# EAGLE board MicroView-GiantPanel-v10 (EAGLE 6.5.0), part 1 of 13
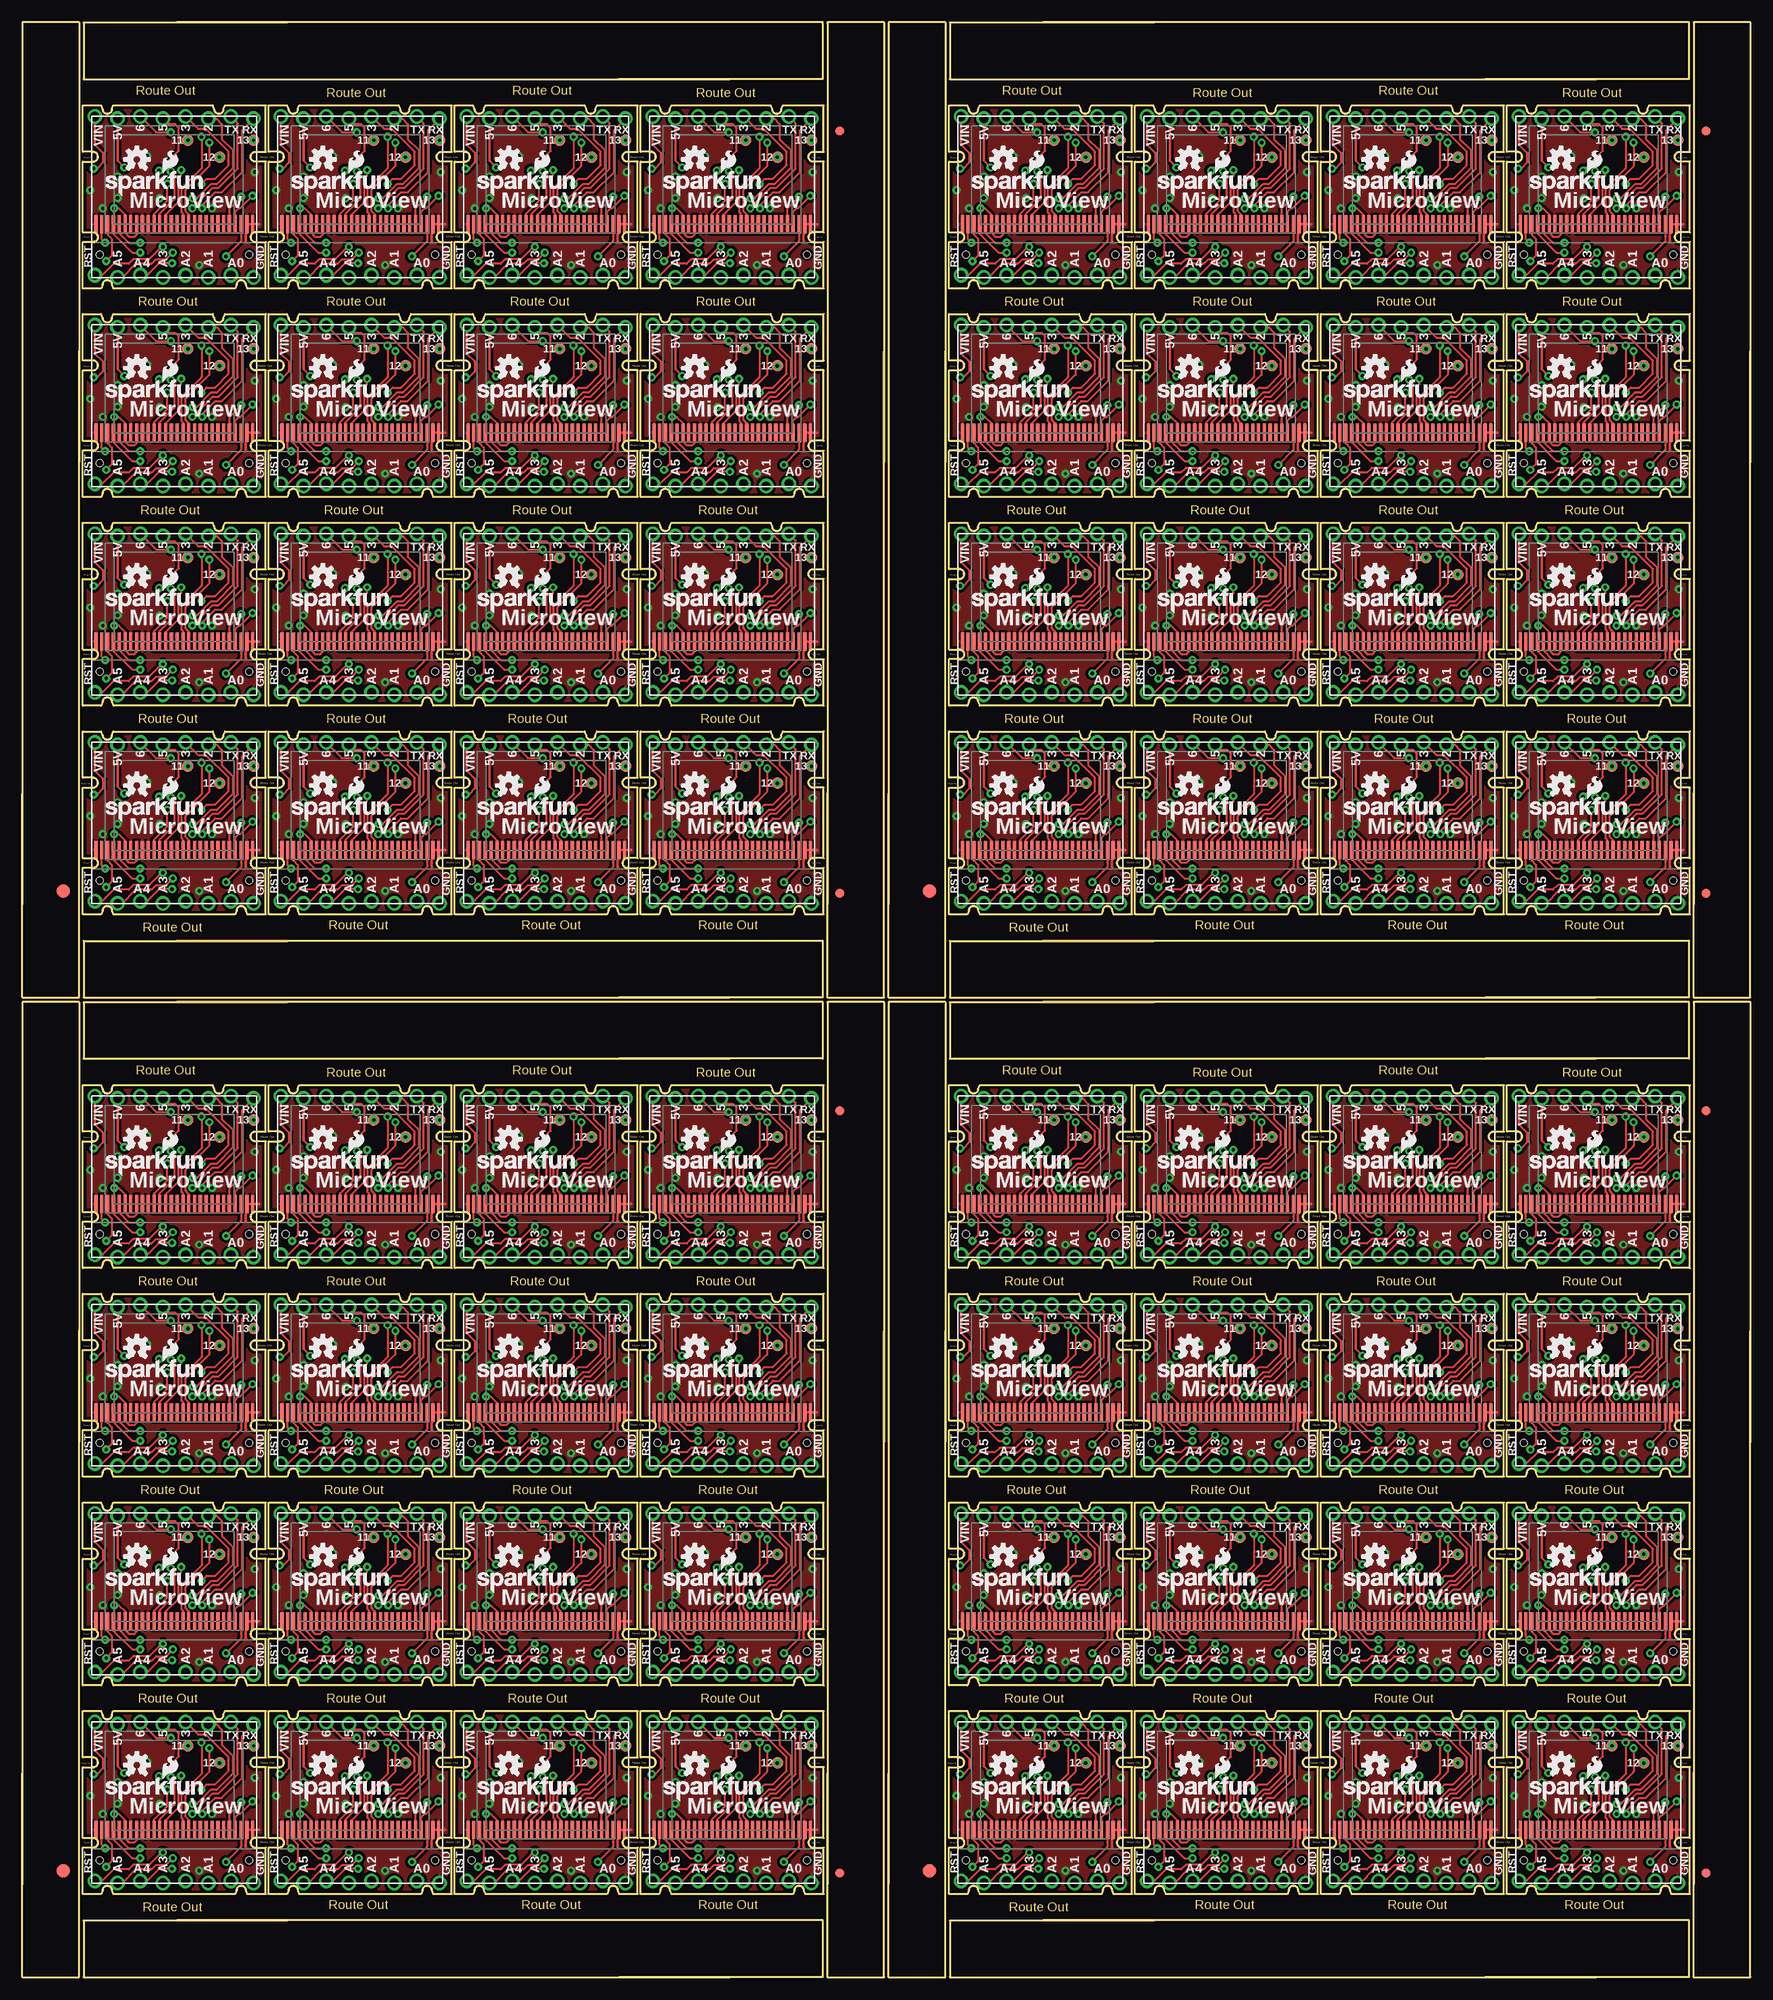
[diagram p0: board, top side]
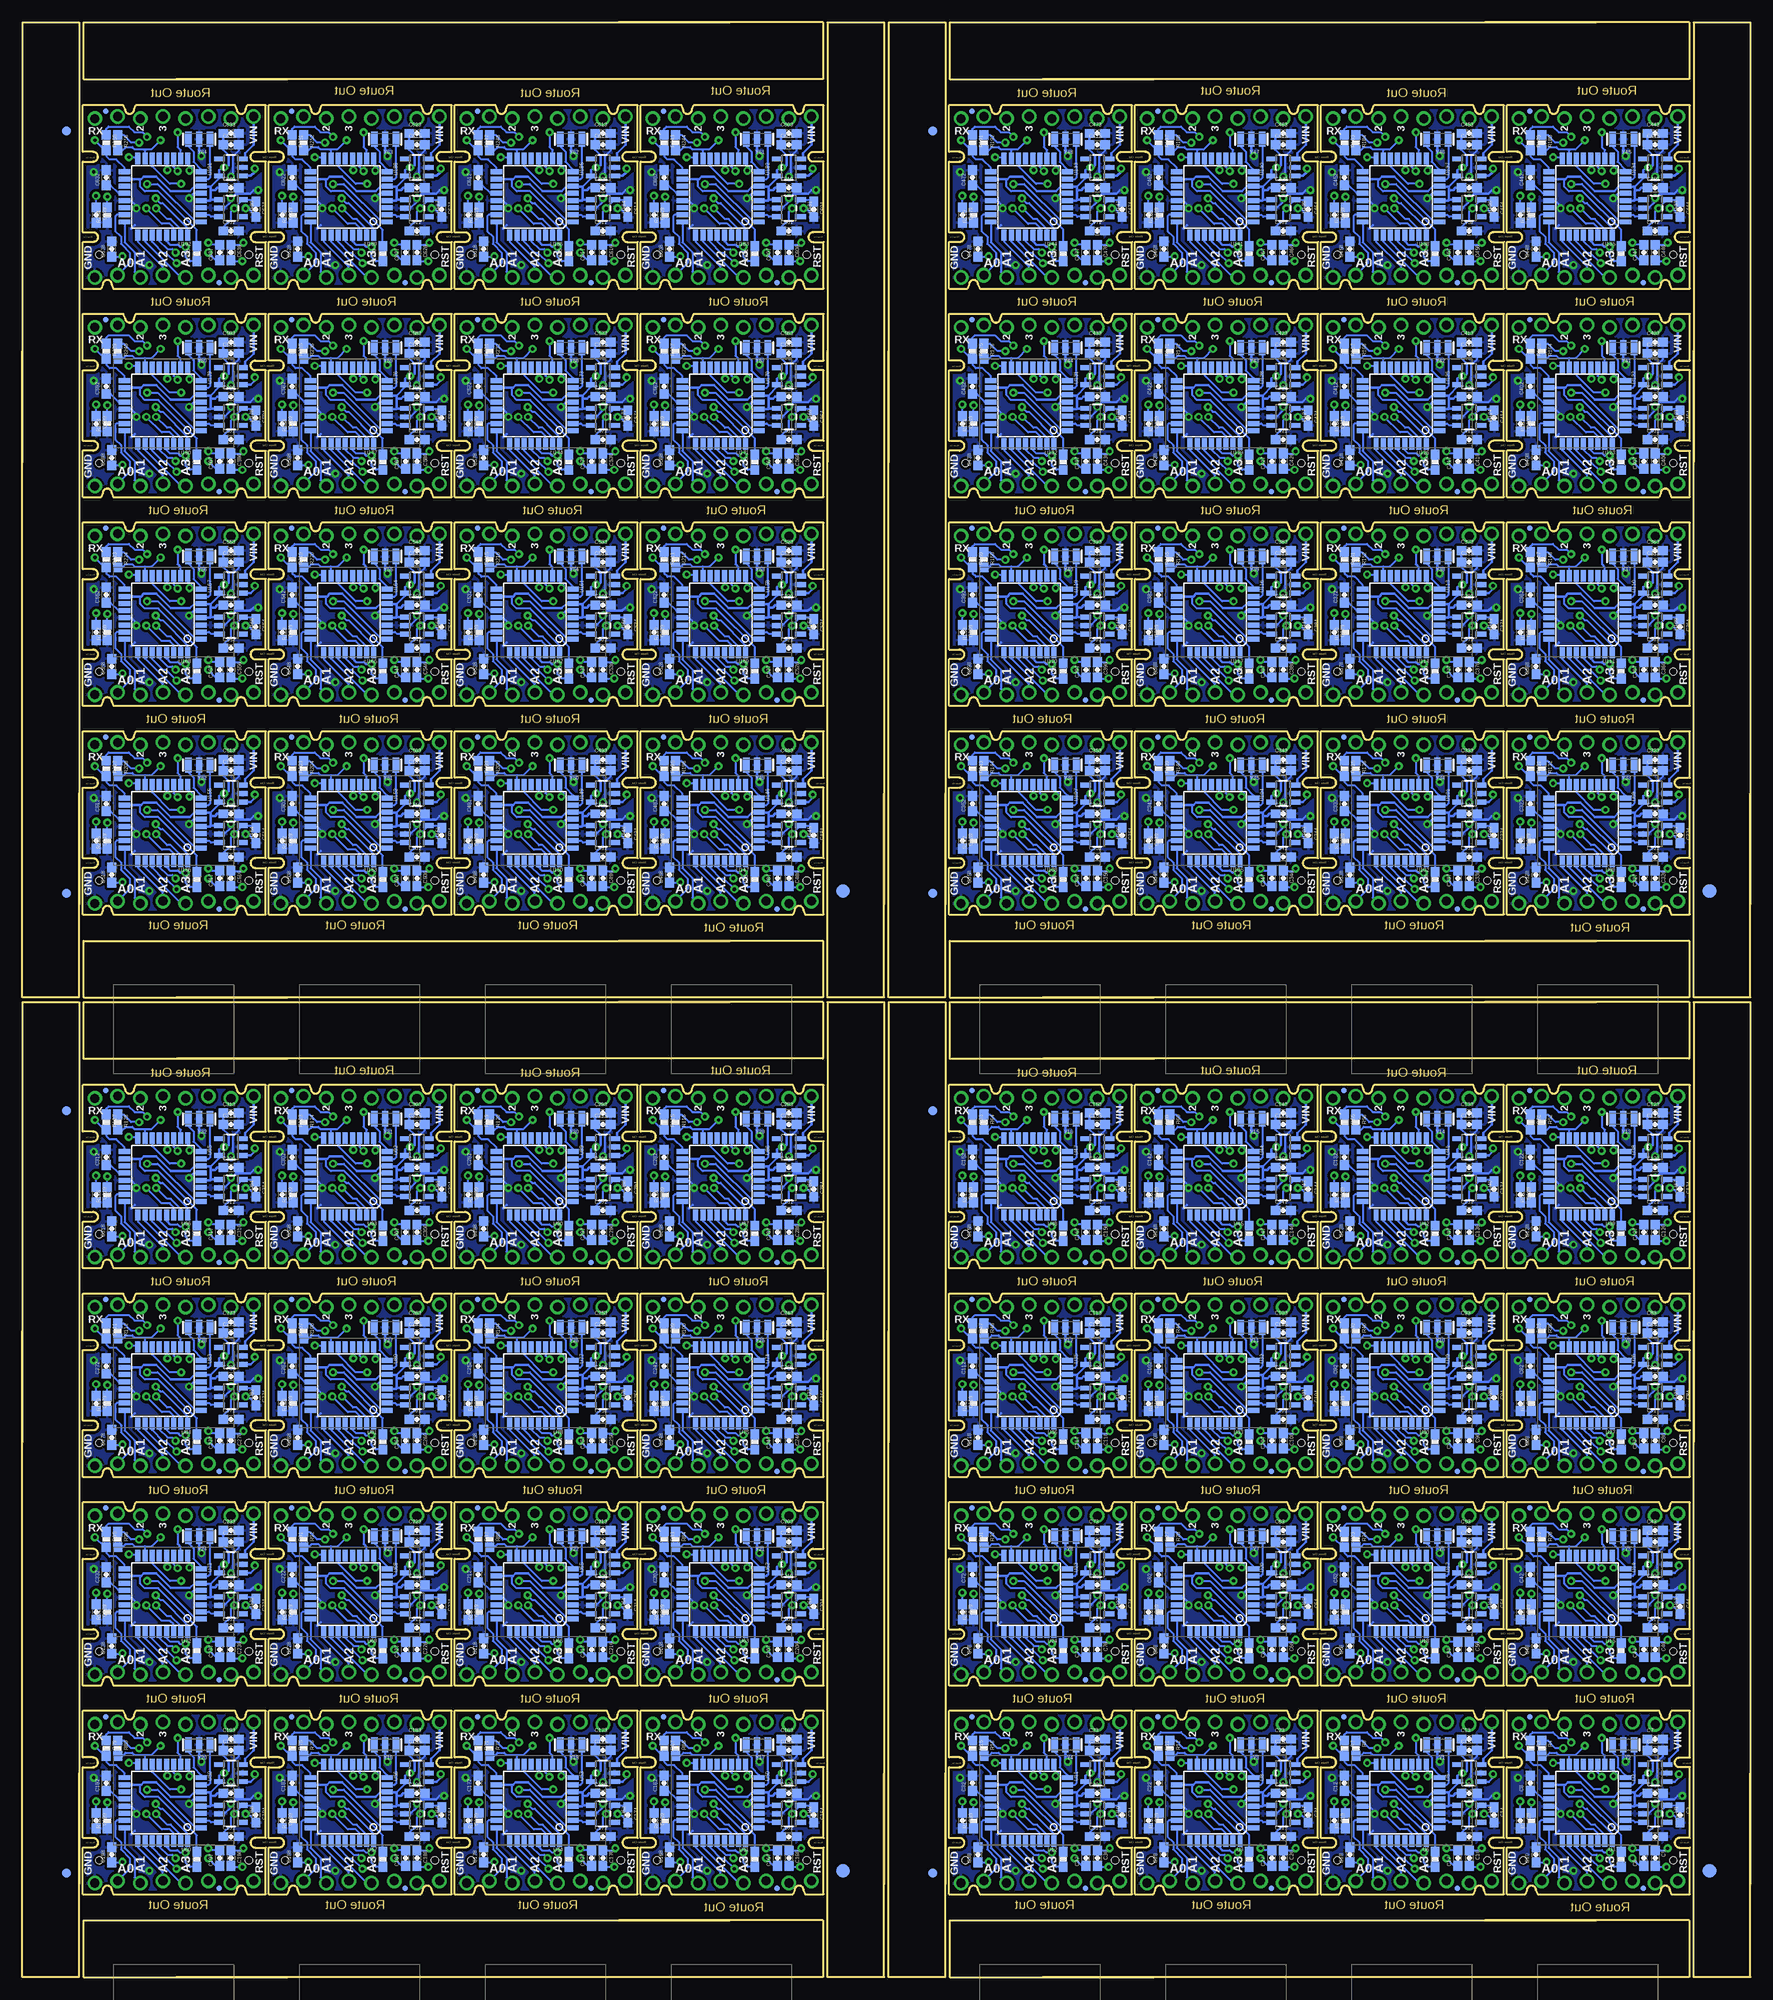
[diagram p1: board, bottom side, seen from below]

Size 193.55 x 218.95 mm. Coordinates in mm from the lower left corner, seen from the top.
Outline: 2400 segments
Copper layers (1*16): Top 0.035mm / dielectric 1.5mm / Bottom 0.035mm
Design rules "SparkFun-2-layer *": minimum track width 7mil, minimum drill 15mil, track to track 8mil, track to pad 8mil, pad to pad 8mil, via to via 8mil, smd to smd 8mil, copper to edge 8mil, drill to drill 8mil, minimum pad ring 12mil, minimum via ring 10mil, stop-mask expansion 4mil, vias tented up to drill 20mil, thermal gap 10mil

## Footprints (pad centres in the part's own frame; a part is rotated, then mirrored left to right if it is on the bottom)
0603-CAP = smd 1.1 x 1: 1 -0.85,0; 2 0.85,0
FIDUCIAL-1.5X3 = smd 1.5 x 1.5: 1 0,0
FIDUCIAL-1X2 = smd 1 x 1: 1 0,0
MICRO-FIDUCIAL = smd 0.635 x 0.635: 1 0,0
MV-DIP16 = drill 1.016: 1 -8.89,-8.763; 2 -6.35,-9.017; 3 -3.81,-8.763; 4 -1.27,-9.017; 5 1.27,-8.763; 6 3.81,-9.017; 7 6.35,-8.763; 8 8.89,-9.017; 9 8.89,8.763; 10 6.35,9.017; 11 3.81,8.763; 12 1.27,9.017; 13 -1.27,8.763; 14 -3.81,9.017; 15 -6.35,8.763; 16 -8.89,9.017
OLED-0.66-64X48 = smd 0.35 x 2: 1 0,0; 2 0.65,0; 3 1.3,0; 4 1.95,0; 5 2.6,0; 6 3.25,0; 7 3.9,0; 8 4.55,0; 9 5.2,0; 10 5.85,0; 11 6.5,0; 12 7.15,0; 13 7.8,0; 14 8.45,0; 15 9.1,0; 16 9.75,0; 17 10.4,0; 18 11.05,0; 19 11.7,0; 20 12.35,0; 21 13,0; 22 13.65,0; 23 14.3,0; 24 14.95,0; 25 15.6,0; 26 16.25,0; 27 16.9,0; 28 17.55,0 | hole 0.8: 17.15,-3.4; 0.4,-3.4
0603-RES = smd 1.1 x 1: 1 -0.85,0; 2 0.85,0
PAD.03X.05 = smd 1.27 x 1.27: P$1 0,0
SOT23-5 = smd 0.55 x 1.2: 1 -0.95,-1.3; 2 0,-1.3; 3 0.95,-1.3; 4 0.95,1.3; 5 -0.95,1.3
TQFP32-08 = smd 1.27 x 0.559: 1 -4.293,2.8; 2 -4.293,2; 3 -4.293,1.2; 4 -4.293,0.4; 5 -4.293,-0.4; 6 -4.293,-1.2; 7 -4.293,-2; 8 -4.293,-2.8; 17 4.293,-2.8; 18 4.293,-2; 19 4.293,-1.2; 20 4.293,-0.4; 21 4.293,0.4; 22 4.293,1.2; 23 4.293,2; 24 4.293,2.8 | smd 0.559 x 1.27: 9 -2.8,-4.293; 10 -2,-4.293; 11 -1.2,-4.293; 12 -0.4,-4.293; 13 0.4,-4.293; 14 1.2,-4.293; 15 2,-4.293; 16 2.8,-4.293; 25 2.8,4.293; 26 2,4.293; 27 1.2,4.293; 28 0.4,4.293; 29 -0.4,4.293; 30 -1.2,4.293; 31 -2,4.293; 32 -2.8,4.293
RESONATOR-SMD = smd 0.7 x 1.7: 1 -1.2,0; 2 0,0; 3 1.2,0

## Placement (x,y rotation side)
C1  1.0uF  [0603-CAP]  10.67,20.57 0 bottom
C2  1.0uF  [0603-CAP]  7.87,18.16 270 bottom
C3  0.1uF  [0603-CAP]  10.67,15.75 0 bottom
C4  1.0uF  [0603-CAP]  10.67,25.4 0 bottom
C5  1.0uF  [0603-CAP]  10.67,13.34 270 bottom
C6  1.0uF  [0603-CAP]  11.94,13.34 90 bottom
C7  0.1uF  [0603-CAP]  10.67,26.67 0 bottom
C8  0.1uF  [0603-CAP]  24.64,21.72 90 bottom
C9  2.2uF  [0603-CAP]  25.78,17.53 270 bottom
C10  2.2uF  [0603-CAP]  24,13.72 90 bottom
C11  0.1uF  [0603-CAP]  31.5,15.75 0 bottom
C12  0.1uF  [0603-CAP]  45.47,21.72 90 bottom
C13  0.1uF  [0603-CAP]  31.5,26.67 0 bottom
C14  1.0uF  [0603-CAP]  28.7,18.16 270 bottom
C15  1.0uF  [0603-CAP]  31.5,25.4 0 bottom
C16  1.0uF  [0603-CAP]  31.5,13.34 270 bottom
C17  1.0uF  [0603-CAP]  32.77,13.34 90 bottom
C18  2.2uF  [0603-CAP]  44.83,13.72 90 bottom
C19  2.2uF  [0603-CAP]  46.61,17.53 270 bottom
C20  1.0uF  [0603-CAP]  31.5,20.57 0 bottom
C21  0.1uF  [0603-CAP]  52.32,15.75 0 bottom
C22  0.1uF  [0603-CAP]  66.29,21.72 90 bottom
C23  0.1uF  [0603-CAP]  52.32,26.67 0 bottom
C24  1.0uF  [0603-CAP]  49.53,18.16 270 bottom
C25  1.0uF  [0603-CAP]  52.32,25.4 0 bottom
C26  1.0uF  [0603-CAP]  52.32,13.34 270 bottom
C27  1.0uF  [0603-CAP]  53.59,13.34 90 bottom
C28  2.2uF  [0603-CAP]  65.66,13.72 90 bottom
C29  2.2uF  [0603-CAP]  67.44,17.53 270 bottom
C30  1.0uF  [0603-CAP]  52.32,20.57 0 bottom
C31  0.1uF  [0603-CAP]  73.15,15.75 0 bottom
C32  0.1uF  [0603-CAP]  87.12,21.72 90 bottom
C33  0.1uF  [0603-CAP]  73.15,26.67 0 bottom
C34  1.0uF  [0603-CAP]  70.36,18.16 270 bottom
C35  1.0uF  [0603-CAP]  73.15,25.4 0 bottom
C36  1.0uF  [0603-CAP]  73.15,13.34 270 bottom
C37  1.0uF  [0603-CAP]  74.42,13.34 90 bottom
C38  2.2uF  [0603-CAP]  86.49,13.72 90 bottom
C39  2.2uF  [0603-CAP]  88.27,17.53 270 bottom
C40  1.0uF  [0603-CAP]  73.15,20.57 0 bottom
C41  0.1uF  [0603-CAP]  10.67,39.12 0 bottom
C42  0.1uF  [0603-CAP]  24.64,45.09 90 bottom
C43  0.1uF  [0603-CAP]  10.67,50.04 0 bottom
C44  1.0uF  [0603-CAP]  7.87,41.53 270 bottom
C45  1.0uF  [0603-CAP]  10.67,48.77 0 bottom
C46  1.0uF  [0603-CAP]  10.67,36.7 270 bottom
C47  1.0uF  [0603-CAP]  11.94,36.7 90 bottom
C48  2.2uF  [0603-CAP]  24,37.08 90 bottom
C49  2.2uF  [0603-CAP]  25.78,40.89 270 bottom
C50  1.0uF  [0603-CAP]  10.67,43.94 0 bottom
C51  0.1uF  [0603-CAP]  31.5,39.12 0 bottom
C52  0.1uF  [0603-CAP]  45.47,45.09 90 bottom
C53  0.1uF  [0603-CAP]  31.5,50.04 0 bottom
C54  1.0uF  [0603-CAP]  28.7,41.53 270 bottom
C55  1.0uF  [0603-CAP]  31.5,48.77 0 bottom
C56  1.0uF  [0603-CAP]  31.5,36.7 270 bottom
C57  1.0uF  [0603-CAP]  32.77,36.7 90 bottom
C58  2.2uF  [0603-CAP]  44.83,37.08 90 bottom
C59  2.2uF  [0603-CAP]  46.61,40.89 270 bottom
C60  1.0uF  [0603-CAP]  31.5,43.94 0 bottom
C61  0.1uF  [0603-CAP]  52.32,39.12 0 bottom
C62  0.1uF  [0603-CAP]  66.29,45.09 90 bottom
C63  0.1uF  [0603-CAP]  52.32,50.04 0 bottom
C64  1.0uF  [0603-CAP]  49.53,41.53 270 bottom
C65  1.0uF  [0603-CAP]  52.32,48.77 0 bottom
C66  1.0uF  [0603-CAP]  52.32,36.7 270 bottom
C67  1.0uF  [0603-CAP]  53.59,36.7 90 bottom
C68  2.2uF  [0603-CAP]  65.66,37.08 90 bottom
C69  2.2uF  [0603-CAP]  67.44,40.89 270 bottom
C70  1.0uF  [0603-CAP]  52.32,43.94 0 bottom
C71  0.1uF  [0603-CAP]  73.15,39.12 0 bottom
C72  0.1uF  [0603-CAP]  87.12,45.09 90 bottom
C73  0.1uF  [0603-CAP]  73.15,50.04 0 bottom
C74  1.0uF  [0603-CAP]  70.36,41.53 270 bottom
C75  1.0uF  [0603-CAP]  73.15,48.77 0 bottom
C76  1.0uF  [0603-CAP]  73.15,36.7 270 bottom
C77  1.0uF  [0603-CAP]  74.42,36.7 90 bottom
C78  2.2uF  [0603-CAP]  86.49,37.08 90 bottom
C79  2.2uF  [0603-CAP]  88.27,40.89 270 bottom
C80  1.0uF  [0603-CAP]  73.15,43.94 0 bottom
C81  0.1uF  [0603-CAP]  10.67,62.48 0 bottom
C82  0.1uF  [0603-CAP]  24.64,68.45 90 bottom
C83  0.1uF  [0603-CAP]  10.67,73.41 0 bottom
C84  1.0uF  [0603-CAP]  7.87,64.9 270 bottom
C85  1.0uF  [0603-CAP]  10.67,72.14 0 bottom
C86  1.0uF  [0603-CAP]  10.67,60.07 270 bottom
C87  1.0uF  [0603-CAP]  11.94,60.07 90 bottom
C88  2.2uF  [0603-CAP]  24,60.45 90 bottom
C89  2.2uF  [0603-CAP]  25.78,64.26 270 bottom
C90  1.0uF  [0603-CAP]  10.67,67.31 0 bottom
C91  0.1uF  [0603-CAP]  31.5,62.48 0 bottom
C92  0.1uF  [0603-CAP]  45.47,68.45 90 bottom
C93  0.1uF  [0603-CAP]  31.5,73.41 0 bottom
C94  1.0uF  [0603-CAP]  28.7,64.9 270 bottom
C95  1.0uF  [0603-CAP]  31.5,72.14 0 bottom
C96  1.0uF  [0603-CAP]  31.5,60.07 270 bottom
C97  1.0uF  [0603-CAP]  32.77,60.07 90 bottom
C98  2.2uF  [0603-CAP]  44.83,60.45 90 bottom
C99  2.2uF  [0603-CAP]  46.61,64.26 270 bottom
C100  1.0uF  [0603-CAP]  31.5,67.31 0 bottom
C101  0.1uF  [0603-CAP]  52.32,62.48 0 bottom
C102  0.1uF  [0603-CAP]  66.29,68.45 90 bottom
C103  0.1uF  [0603-CAP]  52.32,73.41 0 bottom
C104  1.0uF  [0603-CAP]  49.53,64.9 270 bottom
C105  1.0uF  [0603-CAP]  52.32,72.14 0 bottom
C106  1.0uF  [0603-CAP]  52.32,60.07 270 bottom
C107  1.0uF  [0603-CAP]  53.59,60.07 90 bottom
C108  2.2uF  [0603-CAP]  65.66,60.45 90 bottom
C109  2.2uF  [0603-CAP]  67.44,64.26 270 bottom
C110  1.0uF  [0603-CAP]  52.32,67.31 0 bottom
C111  0.1uF  [0603-CAP]  73.15,62.48 0 bottom
C112  0.1uF  [0603-CAP]  87.12,68.45 90 bottom
C113  0.1uF  [0603-CAP]  73.15,73.41 0 bottom
C114  1.0uF  [0603-CAP]  70.36,64.9 270 bottom
C115  1.0uF  [0603-CAP]  73.15,72.14 0 bottom
C116  1.0uF  [0603-CAP]  73.15,60.07 270 bottom
C117  1.0uF  [0603-CAP]  74.42,60.07 90 bottom
C118  2.2uF  [0603-CAP]  86.49,60.45 90 bottom
C119  2.2uF  [0603-CAP]  88.27,64.26 270 bottom
C120  1.0uF  [0603-CAP]  73.15,67.31 0 bottom
C121  0.1uF  [0603-CAP]  10.67,85.85 0 bottom
C122  0.1uF  [0603-CAP]  24.64,91.82 90 bottom
C123  0.1uF  [0603-CAP]  10.67,96.77 0 bottom
C124  1.0uF  [0603-CAP]  7.87,88.27 270 bottom
C125  1.0uF  [0603-CAP]  10.67,95.5 0 bottom
C126  1.0uF  [0603-CAP]  10.67,83.44 270 bottom
C127  1.0uF  [0603-CAP]  11.94,83.44 90 bottom
C128  2.2uF  [0603-CAP]  24,83.82 90 bottom
C129  2.2uF  [0603-CAP]  25.78,87.63 270 bottom
C130  1.0uF  [0603-CAP]  10.67,90.68 0 bottom
C131  0.1uF  [0603-CAP]  31.5,85.85 0 bottom
C132  0.1uF  [0603-CAP]  45.47,91.82 90 bottom
C133  0.1uF  [0603-CAP]  31.5,96.77 0 bottom
C134  1.0uF  [0603-CAP]  28.7,88.27 270 bottom
C135  1.0uF  [0603-CAP]  31.5,95.5 0 bottom
C136  1.0uF  [0603-CAP]  31.5,83.44 270 bottom
C137  1.0uF  [0603-CAP]  32.77,83.44 90 bottom
C138  2.2uF  [0603-CAP]  44.83,83.82 90 bottom
C139  2.2uF  [0603-CAP]  46.61,87.63 270 bottom
C140  1.0uF  [0603-CAP]  31.5,90.68 0 bottom
C141  0.1uF  [0603-CAP]  52.32,85.85 0 bottom
C142  0.1uF  [0603-CAP]  66.29,91.82 90 bottom
C143  0.1uF  [0603-CAP]  52.32,96.77 0 bottom
C144  1.0uF  [0603-CAP]  49.53,88.27 270 bottom
C145  1.0uF  [0603-CAP]  52.32,95.5 0 bottom
C146  1.0uF  [0603-CAP]  52.32,83.44 270 bottom
C147  1.0uF  [0603-CAP]  53.59,83.44 90 bottom
C148  2.2uF  [0603-CAP]  65.66,83.82 90 bottom
C149  2.2uF  [0603-CAP]  67.44,87.63 270 bottom
C150  1.0uF  [0603-CAP]  52.32,90.68 0 bottom
C151  0.1uF  [0603-CAP]  73.15,85.85 0 bottom
C152  0.1uF  [0603-CAP]  87.12,91.82 90 bottom
C153  0.1uF  [0603-CAP]  73.15,96.77 0 bottom
C154  1.0uF  [0603-CAP]  70.36,88.27 270 bottom
C155  1.0uF  [0603-CAP]  73.15,95.5 0 bottom
C156  1.0uF  [0603-CAP]  73.15,83.44 270 bottom
C157  1.0uF  [0603-CAP]  74.42,83.44 90 bottom
C158  2.2uF  [0603-CAP]  86.49,83.82 90 bottom
C159  2.2uF  [0603-CAP]  88.27,87.63 270 bottom
C160  1.0uF  [0603-CAP]  73.15,90.68 0 bottom
C161  0.1uF  [0603-CAP]  107.7,15.75 0 bottom
C162  0.1uF  [0603-CAP]  121.67,21.72 90 bottom
C163  0.1uF  [0603-CAP]  107.7,26.67 0 bottom
C164  1.0uF  [0603-CAP]  104.9,18.16 270 bottom
C165  1.0uF  [0603-CAP]  107.7,25.4 0 bottom
C166  1.0uF  [0603-CAP]  107.7,13.34 270 bottom
C167  1.0uF  [0603-CAP]  108.97,13.34 90 bottom
C168  2.2uF  [0603-CAP]  121.03,13.72 90 bottom
C169  2.2uF  [0603-CAP]  122.81,17.53 270 bottom
C170  1.0uF  [0603-CAP]  107.7,20.57 0 bottom
C171  0.1uF  [0603-CAP]  128.52,15.75 0 bottom
C172  0.1uF  [0603-CAP]  142.49,21.72 90 bottom
C173  0.1uF  [0603-CAP]  128.52,26.67 0 bottom
C174  1.0uF  [0603-CAP]  125.73,18.16 270 bottom
C175  1.0uF  [0603-CAP]  128.52,25.4 0 bottom
C176  1.0uF  [0603-CAP]  128.52,13.34 270 bottom
C177  1.0uF  [0603-CAP]  129.79,13.34 90 bottom
C178  2.2uF  [0603-CAP]  141.86,13.72 90 bottom
C179  2.2uF  [0603-CAP]  143.64,17.53 270 bottom
C180  1.0uF  [0603-CAP]  128.52,20.57 0 bottom
C181  0.1uF  [0603-CAP]  149.35,15.75 0 bottom
C182  0.1uF  [0603-CAP]  163.32,21.72 90 bottom
C183  0.1uF  [0603-CAP]  149.35,26.67 0 bottom
C184  1.0uF  [0603-CAP]  146.56,18.16 270 bottom
C185  1.0uF  [0603-CAP]  149.35,25.4 0 bottom
C186  1.0uF  [0603-CAP]  149.35,13.34 270 bottom
C187  1.0uF  [0603-CAP]  150.62,13.34 90 bottom
C188  2.2uF  [0603-CAP]  162.69,13.72 90 bottom
C189  2.2uF  [0603-CAP]  164.47,17.53 270 bottom
C190  1.0uF  [0603-CAP]  149.35,20.57 0 bottom
C191  0.1uF  [0603-CAP]  170.18,15.75 0 bottom
C192  0.1uF  [0603-CAP]  184.15,21.72 90 bottom
C193  0.1uF  [0603-CAP]  170.18,26.67 0 bottom
C194  1.0uF  [0603-CAP]  167.39,18.16 270 bottom
C195  1.0uF  [0603-CAP]  170.18,25.4 0 bottom
C196  1.0uF  [0603-CAP]  170.18,13.34 270 bottom
C197  1.0uF  [0603-CAP]  171.45,13.34 90 bottom
C198  2.2uF  [0603-CAP]  183.51,13.72 90 bottom
C199  2.2uF  [0603-CAP]  185.29,17.53 270 bottom
C200  1.0uF  [0603-CAP]  170.18,20.57 0 bottom
C201  0.1uF  [0603-CAP]  107.7,39.12 0 bottom
C202  0.1uF  [0603-CAP]  121.67,45.09 90 bottom
C203  0.1uF  [0603-CAP]  107.7,50.04 0 bottom
C204  1.0uF  [0603-CAP]  104.9,41.53 270 bottom
C205  1.0uF  [0603-CAP]  107.7,48.77 0 bottom
C206  1.0uF  [0603-CAP]  107.7,36.7 270 bottom
C207  1.0uF  [0603-CAP]  108.97,36.7 90 bottom
C208  2.2uF  [0603-CAP]  121.03,37.08 90 bottom
C209  2.2uF  [0603-CAP]  122.81,40.89 270 bottom
C210  1.0uF  [0603-CAP]  107.7,43.94 0 bottom
C211  0.1uF  [0603-CAP]  128.52,39.12 0 bottom
C212  0.1uF  [0603-CAP]  142.49,45.09 90 bottom
C213  0.1uF  [0603-CAP]  128.52,50.04 0 bottom
C214  1.0uF  [0603-CAP]  125.73,41.53 270 bottom
C215  1.0uF  [0603-CAP]  128.52,48.77 0 bottom
C216  1.0uF  [0603-CAP]  128.52,36.7 270 bottom
C217  1.0uF  [0603-CAP]  129.79,36.7 90 bottom
C218  2.2uF  [0603-CAP]  141.86,37.08 90 bottom
C219  2.2uF  [0603-CAP]  143.64,40.89 270 bottom
C220  1.0uF  [0603-CAP]  128.52,43.94 0 bottom
C221  0.1uF  [0603-CAP]  149.35,39.12 0 bottom
C222  0.1uF  [0603-CAP]  163.32,45.09 90 bottom
C223  0.1uF  [0603-CAP]  149.35,50.04 0 bottom
C224  1.0uF  [0603-CAP]  146.56,41.53 270 bottom
C225  1.0uF  [0603-CAP]  149.35,48.77 0 bottom
C226  1.0uF  [0603-CAP]  149.35,36.7 270 bottom
C227  1.0uF  [0603-CAP]  150.62,36.7 90 bottom
C228  2.2uF  [0603-CAP]  162.69,37.08 90 bottom
C229  2.2uF  [0603-CAP]  164.47,40.89 270 bottom
C230  1.0uF  [0603-CAP]  149.35,43.94 0 bottom
C231  0.1uF  [0603-CAP]  170.18,39.12 0 bottom
C232  0.1uF  [0603-CAP]  184.15,45.09 90 bottom
C233  0.1uF  [0603-CAP]  170.18,50.04 0 bottom
C234  1.0uF  [0603-CAP]  167.39,41.53 270 bottom
C235  1.0uF  [0603-CAP]  170.18,48.77 0 bottom
C236  1.0uF  [0603-CAP]  170.18,36.7 270 bottom
C237  1.0uF  [0603-CAP]  171.45,36.7 90 bottom
C238  2.2uF  [0603-CAP]  183.51,37.08 90 bottom
C239  2.2uF  [0603-CAP]  185.29,40.89 270 bottom
C240  1.0uF  [0603-CAP]  170.18,43.94 0 bottom
C241  0.1uF  [0603-CAP]  107.7,62.48 0 bottom
C242  0.1uF  [0603-CAP]  121.67,68.45 90 bottom
C243  0.1uF  [0603-CAP]  107.7,73.41 0 bottom
C244  1.0uF  [0603-CAP]  104.9,64.9 270 bottom
C245  1.0uF  [0603-CAP]  107.7,72.14 0 bottom
C246  1.0uF  [0603-CAP]  107.7,60.07 270 bottom
C247  1.0uF  [0603-CAP]  108.97,60.07 90 bottom
C248  2.2uF  [0603-CAP]  121.03,60.45 90 bottom
C249  2.2uF  [0603-CAP]  122.81,64.26 270 bottom
C250  1.0uF  [0603-CAP]  107.7,67.31 0 bottom
C251  0.1uF  [0603-CAP]  128.52,62.48 0 bottom
C252  0.1uF  [0603-CAP]  142.49,68.45 90 bottom
C253  0.1uF  [0603-CAP]  128.52,73.41 0 bottom
C254  1.0uF  [0603-CAP]  125.73,64.9 270 bottom
C255  1.0uF  [0603-CAP]  128.52,72.14 0 bottom
C256  1.0uF  [0603-CAP]  128.52,60.07 270 bottom
C257  1.0uF  [0603-CAP]  129.79,60.07 90 bottom
C258  2.2uF  [0603-CAP]  141.86,60.45 90 bottom
C259  2.2uF  [0603-CAP]  143.64,64.26 270 bottom
C260  1.0uF  [0603-CAP]  128.52,67.31 0 bottom
C261  0.1uF  [0603-CAP]  149.35,62.48 0 bottom
C262  0.1uF  [0603-CAP]  163.32,68.45 90 bottom
C263  0.1uF  [0603-CAP]  149.35,73.41 0 bottom
C264  1.0uF  [0603-CAP]  146.56,64.9 270 bottom
C265  1.0uF  [0603-CAP]  149.35,72.14 0 bottom
C266  1.0uF  [0603-CAP]  149.35,60.07 270 bottom
C267  1.0uF  [0603-CAP]  150.62,60.07 90 bottom
C268  2.2uF  [0603-CAP]  162.69,60.45 90 bottom
C269  2.2uF  [0603-CAP]  164.47,64.26 270 bottom
C270  1.0uF  [0603-CAP]  149.35,67.31 0 bottom
C271  0.1uF  [0603-CAP]  170.18,62.48 0 bottom
C272  0.1uF  [0603-CAP]  184.15,68.45 90 bottom
C273  0.1uF  [0603-CAP]  170.18,73.41 0 bottom
C274  1.0uF  [0603-CAP]  167.39,64.9 270 bottom
C275  1.0uF  [0603-CAP]  170.18,72.14 0 bottom
C276  1.0uF  [0603-CAP]  170.18,60.07 270 bottom
C277  1.0uF  [0603-CAP]  171.45,60.07 90 bottom
C278  2.2uF  [0603-CAP]  183.51,60.45 90 bottom
C279  2.2uF  [0603-CAP]  185.29,64.26 270 bottom
C280  1.0uF  [0603-CAP]  170.18,67.31 0 bottom
C281  0.1uF  [0603-CAP]  107.7,85.85 0 bottom
C282  0.1uF  [0603-CAP]  121.67,91.82 90 bottom
C283  0.1uF  [0603-CAP]  107.7,96.77 0 bottom
C284  1.0uF  [0603-CAP]  104.9,88.27 270 bottom
C285  1.0uF  [0603-CAP]  107.7,95.5 0 bottom
C286  1.0uF  [0603-CAP]  107.7,83.44 270 bottom
C287  1.0uF  [0603-CAP]  108.97,83.44 90 bottom
C288  2.2uF  [0603-CAP]  121.03,83.82 90 bottom
C289  2.2uF  [0603-CAP]  122.81,87.63 270 bottom
C290  1.0uF  [0603-CAP]  107.7,90.68 0 bottom
C291  0.1uF  [0603-CAP]  128.52,85.85 0 bottom
C292  0.1uF  [0603-CAP]  142.49,91.82 90 bottom
C293  0.1uF  [0603-CAP]  128.52,96.77 0 bottom
C294  1.0uF  [0603-CAP]  125.73,88.27 270 bottom
C295  1.0uF  [0603-CAP]  128.52,95.5 0 bottom
C296  1.0uF  [0603-CAP]  128.52,83.44 270 bottom
C297  1.0uF  [0603-CAP]  129.79,83.44 90 bottom
C298  2.2uF  [0603-CAP]  141.86,83.82 90 bottom
C299  2.2uF  [0603-CAP]  143.64,87.63 270 bottom
C300  1.0uF  [0603-CAP]  128.52,90.68 0 bottom
C301  0.1uF  [0603-CAP]  149.35,85.85 0 bottom
C302  0.1uF  [0603-CAP]  163.32,91.82 90 bottom
C303  0.1uF  [0603-CAP]  149.35,96.77 0 bottom
C304  1.0uF  [0603-CAP]  146.56,88.27 270 bottom
C305  1.0uF  [0603-CAP]  149.35,95.5 0 bottom
C306  1.0uF  [0603-CAP]  149.35,83.44 270 bottom
C307  1.0uF  [0603-CAP]  150.62,83.44 90 bottom
C308  2.2uF  [0603-CAP]  162.69,83.82 90 bottom
C309  2.2uF  [0603-CAP]  164.47,87.63 270 bottom
C310  1.0uF  [0603-CAP]  149.35,90.68 0 bottom
C311  0.1uF  [0603-CAP]  170.18,85.85 0 bottom
C312  0.1uF  [0603-CAP]  184.15,91.82 90 bottom
C313  0.1uF  [0603-CAP]  170.18,96.77 0 bottom
C314  1.0uF  [0603-CAP]  167.39,88.27 270 bottom
C315  1.0uF  [0603-CAP]  170.18,95.5 0 bottom
C316  1.0uF  [0603-CAP]  170.18,83.44 270 bottom
C317  1.0uF  [0603-CAP]  171.45,83.44 90 bottom
C318  2.2uF  [0603-CAP]  183.51,83.82 90 bottom
C319  2.2uF  [0603-CAP]  185.29,87.63 270 bottom
C320  1.0uF  [0603-CAP]  170.18,90.68 0 bottom
C321  0.1uF  [0603-CAP]  10.67,125.48 0 bottom
C322  0.1uF  [0603-CAP]  24.64,131.44 90 bottom
C323  0.1uF  [0603-CAP]  10.67,136.4 0 bottom
C324  1.0uF  [0603-CAP]  7.87,127.89 270 bottom
C325  1.0uF  [0603-CAP]  10.67,135.13 0 bottom
C326  1.0uF  [0603-CAP]  10.67,123.06 270 bottom
C327  1.0uF  [0603-CAP]  11.94,123.06 90 bottom
C328  2.2uF  [0603-CAP]  24,123.44 90 bottom
C329  2.2uF  [0603-CAP]  25.78,127.25 270 bottom
C330  1.0uF  [0603-CAP]  10.67,130.3 0 bottom
C331  0.1uF  [0603-CAP]  31.5,125.48 0 bottom
C332  0.1uF  [0603-CAP]  45.47,131.44 90 bottom
C333  0.1uF  [0603-CAP]  31.5,136.4 0 bottom
C334  1.0uF  [0603-CAP]  28.7,127.89 270 bottom
C335  1.0uF  [0603-CAP]  31.5,135.13 0 bottom
C336  1.0uF  [0603-CAP]  31.5,123.06 270 bottom
C337  1.0uF  [0603-CAP]  32.77,123.06 90 bottom
C338  2.2uF  [0603-CAP]  44.83,123.44 90 bottom
C339  2.2uF  [0603-CAP]  46.61,127.25 270 bottom
C340  1.0uF  [0603-CAP]  31.5,130.3 0 bottom
C341  0.1uF  [0603-CAP]  52.32,125.48 0 bottom
C342  0.1uF  [0603-CAP]  66.29,131.44 90 bottom
C343  0.1uF  [0603-CAP]  52.32,136.4 0 bottom
C344  1.0uF  [0603-CAP]  49.53,127.89 270 bottom
C345  1.0uF  [0603-CAP]  52.32,135.13 0 bottom
C346  1.0uF  [0603-CAP]  52.32,123.06 270 bottom
C347  1.0uF  [0603-CAP]  53.59,123.06 90 bottom
C348  2.2uF  [0603-CAP]  65.66,123.44 90 bottom
C349  2.2uF  [0603-CAP]  67.44,127.25 270 bottom
C350  1.0uF  [0603-CAP]  52.32,130.3 0 bottom
C351  0.1uF  [0603-CAP]  73.15,125.48 0 bottom
C352  0.1uF  [0603-CAP]  87.12,131.44 90 bottom
C353  0.1uF  [0603-CAP]  73.15,136.4 0 bottom
C354  1.0uF  [0603-CAP]  70.36,127.89 270 bottom
C355  1.0uF  [0603-CAP]  73.15,135.13 0 bottom
C356  1.0uF  [0603-CAP]  73.15,123.06 270 bottom
C357  1.0uF  [0603-CAP]  74.42,123.06 90 bottom
C358  2.2uF  [0603-CAP]  86.49,123.44 90 bottom
C359  2.2uF  [0603-CAP]  88.27,127.25 270 bottom
C360  1.0uF  [0603-CAP]  73.15,130.3 0 bottom
C361  0.1uF  [0603-CAP]  10.67,148.84 0 bottom
C362  0.1uF  [0603-CAP]  24.64,154.81 90 bottom
C363  0.1uF  [0603-CAP]  10.67,159.77 0 bottom
C364  1.0uF  [0603-CAP]  7.87,151.26 270 bottom
C365  1.0uF  [0603-CAP]  10.67,158.5 0 bottom
C366  1.0uF  [0603-CAP]  10.67,146.43 270 bottom
C367  1.0uF  [0603-CAP]  11.94,146.43 90 bottom
C368  2.2uF  [0603-CAP]  24,146.81 90 bottom
C369  2.2uF  [0603-CAP]  25.78,150.62 270 bottom
C370  1.0uF  [0603-CAP]  10.67,153.67 0 bottom
C371  0.1uF  [0603-CAP]  31.5,148.84 0 bottom
C372  0.1uF  [0603-CAP]  45.47,154.81 90 bottom
C373  0.1uF  [0603-CAP]  31.5,159.77 0 bottom
C374  1.0uF  [0603-CAP]  28.7,151.26 270 bottom
C375  1.0uF  [0603-CAP]  31.5,158.5 0 bottom
C376  1.0uF  [0603-CAP]  31.5,146.43 270 bottom
C377  1.0uF  [0603-CAP]  32.77,146.43 90 bottom
C378  2.2uF  [0603-CAP]  44.83,146.81 90 bottom
C379  2.2uF  [0603-CAP]  46.61,150.62 270 bottom
C380  1.0uF  [0603-CAP]  31.5,153.67 0 bottom
C381  0.1uF  [0603-CAP]  52.32,148.84 0 bottom
C382  0.1uF  [0603-CAP]  66.29,154.81 90 bottom
C383  0.1uF  [0603-CAP]  52.32,159.77 0 bottom
C384  1.0uF  [0603-CAP]  49.53,151.26 270 bottom
C385  1.0uF  [0603-CAP]  52.32,158.5 0 bottom
C386  1.0uF  [0603-CAP]  52.32,146.43 270 bottom
C387  1.0uF  [0603-CAP]  53.59,146.43 90 bottom
C388  2.2uF  [0603-CAP]  65.66,146.81 90 bottom
C389  2.2uF  [0603-CAP]  67.44,150.62 270 bottom
C390  1.0uF  [0603-CAP]  52.32,153.67 0 bottom
C391  0.1uF  [0603-CAP]  73.15,148.84 0 bottom
C392  0.1uF  [0603-CAP]  87.12,154.81 90 bottom
C393  0.1uF  [0603-CAP]  73.15,159.77 0 bottom
C394  1.0uF  [0603-CAP]  70.36,151.26 270 bottom
C395  1.0uF  [0603-CAP]  73.15,158.5 0 bottom
C396  1.0uF  [0603-CAP]  73.15,146.43 270 bottom
C397  1.0uF  [0603-CAP]  74.42,146.43 90 bottom
C398  2.2uF  [0603-CAP]  86.49,146.81 90 bottom
C399  2.2uF  [0603-CAP]  88.27,150.62 270 bottom
C400  1.0uF  [0603-CAP]  73.15,153.67 0 bottom
C401  0.1uF  [0603-CAP]  10.67,172.21 0 bottom
C402  0.1uF  [0603-CAP]  24.64,178.18 90 bottom
C403  0.1uF  [0603-CAP]  10.67,183.13 0 bottom
C404  1.0uF  [0603-CAP]  7.87,174.62 270 bottom
C405  1.0uF  [0603-CAP]  10.67,181.86 0 bottom
C406  1.0uF  [0603-CAP]  10.67,169.8 270 bottom
C407  1.0uF  [0603-CAP]  11.94,169.8 90 bottom
C408  2.2uF  [0603-CAP]  24,170.18 90 bottom
C409  2.2uF  [0603-CAP]  25.78,173.99 270 bottom
C410  1.0uF  [0603-CAP]  10.67,177.04 0 bottom
C411  0.1uF  [0603-CAP]  31.5,172.21 0 bottom
C412  0.1uF  [0603-CAP]  45.47,178.18 90 bottom
C413  0.1uF  [0603-CAP]  31.5,183.13 0 bottom
C414  1.0uF  [0603-CAP]  28.7,174.62 270 bottom
C415  1.0uF  [0603-CAP]  31.5,181.86 0 bottom
C416  1.0uF  [0603-CAP]  31.5,169.8 270 bottom
C417  1.0uF  [0603-CAP]  32.77,169.8 90 bottom
C418  2.2uF  [0603-CAP]  44.83,170.18 90 bottom
C419  2.2uF  [0603-CAP]  46.61,173.99 270 bottom
C420  1.0uF  [0603-CAP]  31.5,177.04 0 bottom
C421  0.1uF  [0603-CAP]  52.32,172.21 0 bottom
C422  0.1uF  [0603-CAP]  66.29,178.18 90 bottom
C423  0.1uF  [0603-CAP]  52.32,183.13 0 bottom
C424  1.0uF  [0603-CAP]  49.53,174.62 270 bottom
C425  1.0uF  [0603-CAP]  52.32,181.86 0 bottom
C426  1.0uF  [0603-CAP]  52.32,169.8 270 bottom
C427  1.0uF  [0603-CAP]  53.59,169.8 90 bottom
C428  2.2uF  [0603-CAP]  65.66,170.18 90 bottom
C429  2.2uF  [0603-CAP]  67.44,173.99 270 bottom
C430  1.0uF  [0603-CAP]  52.32,177.04 0 bottom
C431  0.1uF  [0603-CAP]  73.15,172.21 0 bottom
C432  0.1uF  [0603-CAP]  87.12,178.18 90 bottom
C433  0.1uF  [0603-CAP]  73.15,183.13 0 bottom
C434  1.0uF  [0603-CAP]  70.36,174.62 270 bottom
C435  1.0uF  [0603-CAP]  73.15,181.86 0 bottom
C436  1.0uF  [0603-CAP]  73.15,169.8 270 bottom
C437  1.0uF  [0603-CAP]  74.42,169.8 90 bottom
C438  2.2uF  [0603-CAP]  86.49,170.18 90 bottom
C439  2.2uF  [0603-CAP]  88.27,173.99 270 bottom
C440  1.0uF  [0603-CAP]  73.15,177.04 0 bottom
C441  0.1uF  [0603-CAP]  10.67,195.58 0 bottom
C442  0.1uF  [0603-CAP]  24.64,201.55 90 bottom
C443  0.1uF  [0603-CAP]  10.67,206.5 0 bottom
C444  1.0uF  [0603-CAP]  7.87,197.99 270 bottom
C445  1.0uF  [0603-CAP]  10.67,205.23 0 bottom
C446  1.0uF  [0603-CAP]  10.67,193.17 270 bottom
C447  1.0uF  [0603-CAP]  11.94,193.17 90 bottom
C448  2.2uF  [0603-CAP]  24,193.55 90 bottom
C449  2.2uF  [0603-CAP]  25.78,197.36 270 bottom
C450  1.0uF  [0603-CAP]  10.67,200.41 0 bottom
C451  0.1uF  [0603-CAP]  31.5,195.58 0 bottom
C452  0.1uF  [0603-CAP]  45.47,201.55 90 bottom
C453  0.1uF  [0603-CAP]  31.5,206.5 0 bottom
C454  1.0uF  [0603-CAP]  28.7,197.99 270 bottom
C455  1.0uF  [0603-CAP]  31.5,205.23 0 bottom
C456  1.0uF  [0603-CAP]  31.5,193.17 270 bottom
C457  1.0uF  [0603-CAP]  32.77,193.17 90 bottom
C458  2.2uF  [0603-CAP]  44.83,193.55 90 bottom
C459  2.2uF  [0603-CAP]  46.61,197.36 270 bottom
C460  1.0uF  [0603-CAP]  31.5,200.41 0 bottom
C461  0.1uF  [0603-CAP]  52.32,195.58 0 bottom
C462  0.1uF  [0603-CAP]  66.29,201.55 90 bottom
C463  0.1uF  [0603-CAP]  52.32,206.5 0 bottom
C464  1.0uF  [0603-CAP]  49.53,197.99 270 bottom
C465  1.0uF  [0603-CAP]  52.32,205.23 0 bottom
C466  1.0uF  [0603-CAP]  52.32,193.17 270 bottom
C467  1.0uF  [0603-CAP]  53.59,193.17 90 bottom
C468  2.2uF  [0603-CAP]  65.66,193.55 90 bottom
C469  2.2uF  [0603-CAP]  67.44,197.36 270 bottom
C470  1.0uF  [0603-CAP]  52.32,200.41 0 bottom
C471  0.1uF  [0603-CAP]  73.15,195.58 0 bottom
C472  0.1uF  [0603-CAP]  87.12,201.55 90 bottom
C473  0.1uF  [0603-CAP]  73.15,206.5 0 bottom
C474  1.0uF  [0603-CAP]  70.36,197.99 270 bottom
C475  1.0uF  [0603-CAP]  73.15,205.23 0 bottom
C476  1.0uF  [0603-CAP]  73.15,193.17 270 bottom
C477  1.0uF  [0603-CAP]  74.42,193.17 90 bottom
C478  2.2uF  [0603-CAP]  86.49,193.55 90 bottom
C479  2.2uF  [0603-CAP]  88.27,197.36 270 bottom
C480  1.0uF  [0603-CAP]  73.15,200.41 0 bottom
C481  0.1uF  [0603-CAP]  107.7,125.48 0 bottom
C482  0.1uF  [0603-CAP]  121.67,131.44 90 bottom
C483  0.1uF  [0603-CAP]  107.7,136.4 0 bottom
C484  1.0uF  [0603-CAP]  104.9,127.89 270 bottom
C485  1.0uF  [0603-CAP]  107.7,135.13 0 bottom
C486  1.0uF  [0603-CAP]  107.7,123.06 270 bottom
C487  1.0uF  [0603-CAP]  108.97,123.06 90 bottom
C488  2.2uF  [0603-CAP]  121.03,123.44 90 bottom
C489  2.2uF  [0603-CAP]  122.81,127.25 270 bottom
C490  1.0uF  [0603-CAP]  107.7,130.3 0 bottom
C491  0.1uF  [0603-CAP]  128.52,125.48 0 bottom
C492  0.1uF  [0603-CAP]  142.49,131.44 90 bottom
C493  0.1uF  [0603-CAP]  128.52,136.4 0 bottom
C494  1.0uF  [0603-CAP]  125.73,127.89 270 bottom
C495  1.0uF  [0603-CAP]  128.52,135.13 0 bottom
C496  1.0uF  [0603-CAP]  128.52,123.06 270 bottom
C497  1.0uF  [0603-CAP]  129.79,123.06 90 bottom
C498  2.2uF  [0603-CAP]  141.86,123.44 90 bottom
C499  2.2uF  [0603-CAP]  143.64,127.25 270 bottom
C500  1.0uF  [0603-CAP]  128.52,130.3 0 bottom
C501  0.1uF  [0603-CAP]  149.35,125.48 0 bottom
C502  0.1uF  [0603-CAP]  163.32,131.44 90 bottom
C503  0.1uF  [0603-CAP]  149.35,136.4 0 bottom
C504  1.0uF  [0603-CAP]  146.56,127.89 270 bottom
C505  1.0uF  [0603-CAP]  149.35,135.13 0 bottom
C506  1.0uF  [0603-CAP]  149.35,123.06 270 bottom
C507  1.0uF  [0603-CAP]  150.62,123.06 90 bottom
C508  2.2uF  [0603-CAP]  162.69,123.44 90 bottom
C509  2.2uF  [0603-CAP]  164.47,127.25 270 bottom
C510  1.0uF  [0603-CAP]  149.35,130.3 0 bottom
C511  0.1uF  [0603-CAP]  170.18,125.48 0 bottom
C512  0.1uF  [0603-CAP]  184.15,131.44 90 bottom
C513  0.1uF  [0603-CAP]  170.18,136.4 0 bottom
C514  1.0uF  [0603-CAP]  167.39,127.89 270 bottom
C515  1.0uF  [0603-CAP]  170.18,135.13 0 bottom
C516  1.0uF  [0603-CAP]  170.18,123.06 270 bottom
C517  1.0uF  [0603-CAP]  171.45,123.06 90 bottom
C518  2.2uF  [0603-CAP]  183.51,123.44 90 bottom
C519  2.2uF  [0603-CAP]  185.29,127.25 270 bottom
C520  1.0uF  [0603-CAP]  170.18,130.3 0 bottom
C521  0.1uF  [0603-CAP]  107.7,148.84 0 bottom
C522  0.1uF  [0603-CAP]  121.67,154.81 90 bottom
C523  0.1uF  [0603-CAP]  107.7,159.77 0 bottom
C524  1.0uF  [0603-CAP]  104.9,151.26 270 bottom
C525  1.0uF  [0603-CAP]  107.7,158.5 0 bottom
C526  1.0uF  [0603-CAP]  107.7,146.43 270 bottom
C527  1.0uF  [0603-CAP]  108.97,146.43 90 bottom
C528  2.2uF  [0603-CAP]  121.03,146.81 90 bottom
C529  2.2uF  [0603-CAP]  122.81,150.62 270 bottom
C530  1.0uF  [0603-CAP]  107.7,153.67 0 bottom
C531  0.1uF  [0603-CAP]  128.52,148.84 0 bottom
C532  0.1uF  [0603-CAP]  142.49,154.81 90 bottom
C533  0.1uF  [0603-CAP]  128.52,159.77 0 bottom
C534  1.0uF  [0603-CAP]  125.73,151.26 270 bottom
C535  1.0uF  [0603-CAP]  128.52,158.5 0 bottom
C536  1.0uF  [0603-CAP]  128.52,146.43 270 bottom
C537  1.0uF  [0603-CAP]  129.79,146.43 90 bottom
C538  2.2uF  [0603-CAP]  141.86,146.81 90 bottom
C539  2.2uF  [0603-CAP]  143.64,150.62 270 bottom
C540  1.0uF  [0603-CAP]  128.52,153.67 0 bottom
C541  0.1uF  [0603-CAP]  149.35,148.84 0 bottom
C542  0.1uF  [0603-CAP]  163.32,154.81 90 bottom
C543  0.1uF  [0603-CAP]  149.35,159.77 0 bottom
C544  1.0uF  [0603-CAP]  146.56,151.26 270 bottom
C545  1.0uF  [0603-CAP]  149.35,158.5 0 bottom
C546  1.0uF  [0603-CAP]  149.35,146.43 270 bottom
C547  1.0uF  [0603-CAP]  150.62,146.43 90 bottom
C548  2.2uF  [0603-CAP]  162.69,146.81 90 bottom
C549  2.2uF  [0603-CAP]  164.47,150.62 270 bottom
C550  1.0uF  [0603-CAP]  149.35,153.67 0 bottom
C551  0.1uF  [0603-CAP]  170.18,148.84 0 bottom
C552  0.1uF  [0603-CAP]  184.15,154.81 90 bottom
C553  0.1uF  [0603-CAP]  170.18,159.77 0 bottom
C554  1.0uF  [0603-CAP]  167.39,151.26 270 bottom
C555  1.0uF  [0603-CAP]  170.18,158.5 0 bottom
C556  1.0uF  [0603-CAP]  170.18,146.43 270 bottom
C557  1.0uF  [0603-CAP]  171.45,146.43 90 bottom
C558  2.2uF  [0603-CAP]  183.51,146.81 90 bottom
C559  2.2uF  [0603-CAP]  185.29,150.62 270 bottom
C560  1.0uF  [0603-CAP]  170.18,153.67 0 bottom
C561  0.1uF  [0603-CAP]  107.7,172.21 0 bottom
C562  0.1uF  [0603-CAP]  121.67,178.18 90 bottom
C563  0.1uF  [0603-CAP]  107.7,183.13 0 bottom
C564  1.0uF  [0603-CAP]  104.9,174.62 270 bottom
C565  1.0uF  [0603-CAP]  107.7,181.86 0 bottom
C566  1.0uF  [0603-CAP]  107.7,169.8 270 bottom
C567  1.0uF  [0603-CAP]  108.97,169.8 90 bottom
C568  2.2uF  [0603-CAP]  121.03,170.18 90 bottom
C569  2.2uF  [0603-CAP]  122.81,173.99 270 bottom
C570  1.0uF  [0603-CAP]  107.7,177.04 0 bottom
C571  0.1uF  [0603-CAP]  128.52,172.21 0 bottom
C572  0.1uF  [0603-CAP]  142.49,178.18 90 bottom
C573  0.1uF  [0603-CAP]  128.52,183.13 0 bottom
C574  1.0uF  [0603-CAP]  125.73,174.62 270 bottom
C575  1.0uF  [0603-CAP]  128.52,181.86 0 bottom
C576  1.0uF  [0603-CAP]  128.52,169.8 270 bottom
C577  1.0uF  [0603-CAP]  129.79,169.8 90 bottom
C578  2.2uF  [0603-CAP]  141.86,170.18 90 bottom
C579  2.2uF  [0603-CAP]  143.64,173.99 270 bottom
C580  1.0uF  [0603-CAP]  128.52,177.04 0 bottom
C581  0.1uF  [0603-CAP]  149.35,172.21 0 bottom
C582  0.1uF  [0603-CAP]  163.32,178.18 90 bottom
C583  0.1uF  [0603-CAP]  149.35,183.13 0 bottom
C584  1.0uF  [0603-CAP]  146.56,174.62 270 bottom
C585  1.0uF  [0603-CAP]  149.35,181.86 0 bottom
C586  1.0uF  [0603-CAP]  149.35,169.8 270 bottom
C587  1.0uF  [0603-CAP]  150.62,169.8 90 bottom
C588  2.2uF  [0603-CAP]  162.69,170.18 90 bottom
C589  2.2uF  [0603-CAP]  164.47,173.99 270 bottom
C590  1.0uF  [0603-CAP]  149.35,177.04 0 bottom
C591  0.1uF  [0603-CAP]  170.18,172.21 0 bottom
C592  0.1uF  [0603-CAP]  184.15,178.18 90 bottom
C593  0.1uF  [0603-CAP]  170.18,183.13 0 bottom
C594  1.0uF  [0603-CAP]  167.39,174.62 270 bottom
C595  1.0uF  [0603-CAP]  170.18,181.86 0 bottom
C596  1.0uF  [0603-CAP]  170.18,169.8 270 bottom
C597  1.0uF  [0603-CAP]  171.45,169.8 90 bottom
C598  2.2uF  [0603-CAP]  183.51,170.18 90 bottom
C599  2.2uF  [0603-CAP]  185.29,173.99 270 bottom
C600  1.0uF  [0603-CAP]  170.18,177.04 0 bottom
C601  0.1uF  [0603-CAP]  107.7,195.58 0 bottom
C602  0.1uF  [0603-CAP]  121.67,201.55 90 bottom
C603  0.1uF  [0603-CAP]  107.7,206.5 0 bottom
C604  1.0uF  [0603-CAP]  104.9,197.99 270 bottom
C605  1.0uF  [0603-CAP]  107.7,205.23 0 bottom
C606  1.0uF  [0603-CAP]  107.7,193.17 270 bottom
C607  1.0uF  [0603-CAP]  108.97,193.17 90 bottom
C608  2.2uF  [0603-CAP]  121.03,193.55 90 bottom
C609  2.2uF  [0603-CAP]  122.81,197.36 270 bottom
C610  1.0uF  [0603-CAP]  107.7,200.41 0 bottom
C611  0.1uF  [0603-CAP]  128.52,195.58 0 bottom
C612  0.1uF  [0603-CAP]  142.49,201.55 90 bottom
C613  0.1uF  [0603-CAP]  128.52,206.5 0 bottom
C614  1.0uF  [0603-CAP]  125.73,197.99 270 bottom
C615  1.0uF  [0603-CAP]  128.52,205.23 0 bottom
C616  1.0uF  [0603-CAP]  128.52,193.17 270 bottom
C617  1.0uF  [0603-CAP]  129.79,193.17 90 bottom
C618  2.2uF  [0603-CAP]  141.86,193.55 90 bottom
C619  2.2uF  [0603-CAP]  143.64,197.36 270 bottom
C620  1.0uF  [0603-CAP]  128.52,200.41 0 bottom
C621  0.1uF  [0603-CAP]  149.35,195.58 0 bottom
C622  0.1uF  [0603-CAP]  163.32,201.55 90 bottom
C623  0.1uF  [0603-CAP]  149.35,206.5 0 bottom
C624  1.0uF  [0603-CAP]  146.56,197.99 270 bottom
C625  1.0uF  [0603-CAP]  149.35,205.23 0 bottom
C626  1.0uF  [0603-CAP]  149.35,193.17 270 bottom
C627  1.0uF  [0603-CAP]  150.62,193.17 90 bottom
C628  2.2uF  [0603-CAP]  162.69,193.55 90 bottom
C629  2.2uF  [0603-CAP]  164.47,197.36 270 bottom
C630  1.0uF  [0603-CAP]  149.35,200.41 0 bottom
C631  0.1uF  [0603-CAP]  170.18,195.58 0 bottom
C632  0.1uF  [0603-CAP]  184.15,201.55 90 bottom
C633  0.1uF  [0603-CAP]  170.18,206.5 0 bottom
C634  1.0uF  [0603-CAP]  167.39,197.99 270 bottom
C635  1.0uF  [0603-CAP]  170.18,205.23 0 bottom
C636  1.0uF  [0603-CAP]  170.18,193.17 270 bottom
C637  1.0uF  [0603-CAP]  171.45,193.17 90 bottom
C638  2.2uF  [0603-CAP]  183.51,193.55 90 bottom
C639  2.2uF  [0603-CAP]  185.29,197.36 270 bottom
C640  1.0uF  [0603-CAP]  170.18,200.41 0 bottom
E$1  [FIDUCIAL-1.5X3]  4.57,11.94 0 top
E$2  [FIDUCIAL-1.5X3]  4.57,11.94 0 bottom
E$3  [FIDUCIAL-1X2]  91.57,11.68 0 bottom
E$4  [FIDUCIAL-1X2]  91.57,97.03 180 bottom
E$5  [FIDUCIAL-1X2]  188.59,97.03 180 top
E$6  [FIDUCIAL-1X2]  188.59,11.68 0 top
E$7  [FIDUCIAL-1X2]  91.57,97.03 180 top
E$8  [FIDUCIAL-1X2]  91.57,11.68 0 top
E$9  [FIDUCIAL-1.5X3]  101.6,11.94 0 top
E$10  [FIDUCIAL-1.5X3]  101.6,11.94 0 bottom
E$11  [FIDUCIAL-1X2]  188.59,11.68 0 bottom
E$12  [FIDUCIAL-1X2]  188.59,97.03 180 bottom
E$13  [FIDUCIAL-1X2]  91.57,206.76 180 top
E$14  [FIDUCIAL-1X2]  91.57,121.41 0 top
E$15  [FIDUCIAL-1.5X3]  4.57,121.67 0 top
E$16  [FIDUCIAL-1.5X3]  4.57,121.67 0 bottom
E$17  [FIDUCIAL-1X2]  91.57,121.41 0 bottom
E$18  [FIDUCIAL-1X2]  91.57,206.76 180 bottom
E$19  [FIDUCIAL-1X2]  188.59,206.76 180 top
E$20  [FIDUCIAL-1X2]  188.59,121.41 0 top
E$21  [FIDUCIAL-1.5X3]  101.6,121.67 0 top
E$22  [FIDUCIAL-1.5X3]  101.6,121.67 0 bottom
E$23  [FIDUCIAL-1X2]  188.59,121.41 0 bottom
E$24  [FIDUCIAL-1X2]  188.59,206.76 180 bottom
FID1  FIDUCIALUFIDUCIAL  [MICRO-FIDUCIAL]  24.69,29.18 0 bottom
FID2  FIDUCIALUFIDUCIAL  [MICRO-FIDUCIAL]  45.52,29.18 0 bottom
FID3  FIDUCIALUFIDUCIAL  [MICRO-FIDUCIAL]  11.96,9.93 0 bottom
FID4  FIDUCIALUFIDUCIAL  [MICRO-FIDUCIAL]  32.79,9.93 0 bottom
FID5  FIDUCIALUFIDUCIAL  [MICRO-FIDUCIAL]  66.34,29.18 0 bottom
FID6  FIDUCIALUFIDUCIAL  [MICRO-FIDUCIAL]  53.62,9.93 0 bottom
FID7  FIDUCIALUFIDUCIAL  [MICRO-FIDUCIAL]  87.17,29.18 0 bottom
FID8  FIDUCIALUFIDUCIAL  [MICRO-FIDUCIAL]  74.45,9.93 0 bottom
FID9  FIDUCIALUFIDUCIAL  [MICRO-FIDUCIAL]  24.69,52.55 0 bottom
FID10  FIDUCIALUFIDUCIAL  [MICRO-FIDUCIAL]  11.96,33.3 0 bottom
FID11  FIDUCIALUFIDUCIAL  [MICRO-FIDUCIAL]  45.52,52.55 0 bottom
FID12  FIDUCIALUFIDUCIAL  [MICRO-FIDUCIAL]  32.79,33.3 0 bottom
FID13  FIDUCIALUFIDUCIAL  [MICRO-FIDUCIAL]  66.34,52.55 0 bottom
FID14  FIDUCIALUFIDUCIAL  [MICRO-FIDUCIAL]  53.62,33.3 0 bottom
FID15  FIDUCIALUFIDUCIAL  [MICRO-FIDUCIAL]  87.17,52.55 0 bottom
FID16  FIDUCIALUFIDUCIAL  [MICRO-FIDUCIAL]  74.45,33.3 0 bottom
FID17  FIDUCIALUFIDUCIAL  [MICRO-FIDUCIAL]  24.69,75.92 0 bottom
FID18  FIDUCIALUFIDUCIAL  [MICRO-FIDUCIAL]  11.96,56.67 0 bottom
FID19  FIDUCIALUFIDUCIAL  [MICRO-FIDUCIAL]  45.52,75.92 0 bottom
FID20  FIDUCIALUFIDUCIAL  [MICRO-FIDUCIAL]  32.79,56.67 0 bottom
FID21  FIDUCIALUFIDUCIAL  [MICRO-FIDUCIAL]  66.34,75.92 0 bottom
FID22  FIDUCIALUFIDUCIAL  [MICRO-FIDUCIAL]  53.62,56.67 0 bottom
FID23  FIDUCIALUFIDUCIAL  [MICRO-FIDUCIAL]  87.17,75.92 0 bottom
FID24  FIDUCIALUFIDUCIAL  [MICRO-FIDUCIAL]  74.45,56.67 0 bottom
FID25  FIDUCIALUFIDUCIAL  [MICRO-FIDUCIAL]  24.69,99.29 0 bottom
FID26  FIDUCIALUFIDUCIAL  [MICRO-FIDUCIAL]  11.96,80.04 0 bottom
FID27  FIDUCIALUFIDUCIAL  [MICRO-FIDUCIAL]  45.52,99.29 0 bottom
FID28  FIDUCIALUFIDUCIAL  [MICRO-FIDUCIAL]  32.79,80.04 0 bottom
FID29  FIDUCIALUFIDUCIAL  [MICRO-FIDUCIAL]  66.34,99.29 0 bottom
FID30  FIDUCIALUFIDUCIAL  [MICRO-FIDUCIAL]  53.62,80.04 0 bottom
FID31  FIDUCIALUFIDUCIAL  [MICRO-FIDUCIAL]  87.17,99.29 0 bottom
FID32  FIDUCIALUFIDUCIAL  [MICRO-FIDUCIAL]  74.45,80.04 0 bottom
FID33  FIDUCIALUFIDUCIAL  [MICRO-FIDUCIAL]  121.72,29.18 0 bottom
FID34  FIDUCIALUFIDUCIAL  [MICRO-FIDUCIAL]  108.99,9.93 0 bottom
FID35  FIDUCIALUFIDUCIAL  [MICRO-FIDUCIAL]  142.54,29.18 0 bottom
FID36  FIDUCIALUFIDUCIAL  [MICRO-FIDUCIAL]  129.82,9.93 0 bottom
FID37  FIDUCIALUFIDUCIAL  [MICRO-FIDUCIAL]  163.37,29.18 0 bottom
FID38  FIDUCIALUFIDUCIAL  [MICRO-FIDUCIAL]  150.65,9.93 0 bottom
FID39  FIDUCIALUFIDUCIAL  [MICRO-FIDUCIAL]  184.2,29.18 0 bottom
FID40  FIDUCIALUFIDUCIAL  [MICRO-FIDUCIAL]  171.48,9.93 0 bottom
FID41  FIDUCIALUFIDUCIAL  [MICRO-FIDUCIAL]  121.72,52.55 0 bottom
FID42  FIDUCIALUFIDUCIAL  [MICRO-FIDUCIAL]  108.99,33.3 0 bottom
FID43  FIDUCIALUFIDUCIAL  [MICRO-FIDUCIAL]  142.54,52.55 0 bottom
FID44  FIDUCIALUFIDUCIAL  [MICRO-FIDUCIAL]  129.82,33.3 0 bottom
FID45  FIDUCIALUFIDUCIAL  [MICRO-FIDUCIAL]  163.37,52.55 0 bottom
FID46  FIDUCIALUFIDUCIAL  [MICRO-FIDUCIAL]  150.65,33.3 0 bottom
FID47  FIDUCIALUFIDUCIAL  [MICRO-FIDUCIAL]  184.2,52.55 0 bottom
FID48  FIDUCIALUFIDUCIAL  [MICRO-FIDUCIAL]  171.48,33.3 0 bottom
FID49  FIDUCIALUFIDUCIAL  [MICRO-FIDUCIAL]  121.72,75.92 0 bottom
FID50  FIDUCIALUFIDUCIAL  [MICRO-FIDUCIAL]  108.99,56.67 0 bottom
FID51  FIDUCIALUFIDUCIAL  [MICRO-FIDUCIAL]  142.54,75.92 0 bottom
FID52  FIDUCIALUFIDUCIAL  [MICRO-FIDUCIAL]  129.82,56.67 0 bottom
FID53  FIDUCIALUFIDUCIAL  [MICRO-FIDUCIAL]  163.37,75.92 0 bottom
FID54  FIDUCIALUFIDUCIAL  [MICRO-FIDUCIAL]  150.65,56.67 0 bottom
FID55  FIDUCIALUFIDUCIAL  [MICRO-FIDUCIAL]  184.2,75.92 0 bottom
FID56  FIDUCIALUFIDUCIAL  [MICRO-FIDUCIAL]  171.48,56.67 0 bottom
FID57  FIDUCIALUFIDUCIAL  [MICRO-FIDUCIAL]  121.72,99.29 0 bottom
FID58  FIDUCIALUFIDUCIAL  [MICRO-FIDUCIAL]  108.99,80.04 0 bottom
FID59  FIDUCIALUFIDUCIAL  [MICRO-FIDUCIAL]  142.54,99.29 0 bottom
FID60  FIDUCIALUFIDUCIAL  [MICRO-FIDUCIAL]  129.82,80.04 0 bottom
FID61  FIDUCIALUFIDUCIAL  [MICRO-FIDUCIAL]  163.37,99.29 0 bottom
FID62  FIDUCIALUFIDUCIAL  [MICRO-FIDUCIAL]  150.65,80.04 0 bottom
FID63  FIDUCIALUFIDUCIAL  [MICRO-FIDUCIAL]  184.2,99.29 0 bottom
FID64  FIDUCIALUFIDUCIAL  [MICRO-FIDUCIAL]  171.48,80.04 0 bottom
FID65  FIDUCIALUFIDUCIAL  [MICRO-FIDUCIAL]  24.69,138.91 0 bottom
FID66  FIDUCIALUFIDUCIAL  [MICRO-FIDUCIAL]  11.96,119.66 0 bottom
FID67  FIDUCIALUFIDUCIAL  [MICRO-FIDUCIAL]  45.52,138.91 0 bottom
FID68  FIDUCIALUFIDUCIAL  [MICRO-FIDUCIAL]  32.79,119.66 0 bottom
FID69  FIDUCIALUFIDUCIAL  [MICRO-FIDUCIAL]  66.34,138.91 0 bottom
FID70  FIDUCIALUFIDUCIAL  [MICRO-FIDUCIAL]  53.62,119.66 0 bottom
FID71  FIDUCIALUFIDUCIAL  [MICRO-FIDUCIAL]  87.17,138.91 0 bottom
FID72  FIDUCIALUFIDUCIAL  [MICRO-FIDUCIAL]  74.45,119.66 0 bottom
FID73  FIDUCIALUFIDUCIAL  [MICRO-FIDUCIAL]  24.69,162.28 0 bottom
FID74  FIDUCIALUFIDUCIAL  [MICRO-FIDUCIAL]  11.96,143.03 0 bottom
FID75  FIDUCIALUFIDUCIAL  [MICRO-FIDUCIAL]  45.52,162.28 0 bottom
FID76  FIDUCIALUFIDUCIAL  [MICRO-FIDUCIAL]  32.79,143.03 0 bottom
FID77  FIDUCIALUFIDUCIAL  [MICRO-FIDUCIAL]  66.34,162.28 0 bottom
FID78  FIDUCIALUFIDUCIAL  [MICRO-FIDUCIAL]  53.62,143.03 0 bottom
FID79  FIDUCIALUFIDUCIAL  [MICRO-FIDUCIAL]  87.17,162.28 0 bottom
FID80  FIDUCIALUFIDUCIAL  [MICRO-FIDUCIAL]  74.45,143.03 0 bottom
FID81  FIDUCIALUFIDUCIAL  [MICRO-FIDUCIAL]  24.69,185.65 0 bottom
FID82  FIDUCIALUFIDUCIAL  [MICRO-FIDUCIAL]  11.96,166.4 0 bottom
FID83  FIDUCIALUFIDUCIAL  [MICRO-FIDUCIAL]  45.52,185.65 0 bottom
FID84  FIDUCIALUFIDUCIAL  [MICRO-FIDUCIAL]  32.79,166.4 0 bottom
FID85  FIDUCIALUFIDUCIAL  [MICRO-FIDUCIAL]  66.34,185.65 0 bottom
FID86  FIDUCIALUFIDUCIAL  [MICRO-FIDUCIAL]  53.62,166.4 0 bottom
FID87  FIDUCIALUFIDUCIAL  [MICRO-FIDUCIAL]  87.17,185.65 0 bottom
FID88  FIDUCIALUFIDUCIAL  [MICRO-FIDUCIAL]  74.45,166.4 0 bottom
FID89  FIDUCIALUFIDUCIAL  [MICRO-FIDUCIAL]  24.69,209.02 0 bottom
FID90  FIDUCIALUFIDUCIAL  [MICRO-FIDUCIAL]  11.96,189.76 0 bottom
FID91  FIDUCIALUFIDUCIAL  [MICRO-FIDUCIAL]  45.52,209.02 0 bottom
FID92  FIDUCIALUFIDUCIAL  [MICRO-FIDUCIAL]  32.79,189.76 0 bottom
FID93  FIDUCIALUFIDUCIAL  [MICRO-FIDUCIAL]  66.34,209.02 0 bottom
FID94  FIDUCIALUFIDUCIAL  [MICRO-FIDUCIAL]  53.62,189.76 0 bottom
FID95  FIDUCIALUFIDUCIAL  [MICRO-FIDUCIAL]  87.17,209.02 0 bottom
FID96  FIDUCIALUFIDUCIAL  [MICRO-FIDUCIAL]  74.45,189.76 0 bottom
FID97  FIDUCIALUFIDUCIAL  [MICRO-FIDUCIAL]  121.72,138.91 0 bottom
FID98  FIDUCIALUFIDUCIAL  [MICRO-FIDUCIAL]  108.99,119.66 0 bottom
FID99  FIDUCIALUFIDUCIAL  [MICRO-FIDUCIAL]  142.54,138.91 0 bottom
FID100  FIDUCIALUFIDUCIAL  [MICRO-FIDUCIAL]  129.82,119.66 0 bottom
FID101  FIDUCIALUFIDUCIAL  [MICRO-FIDUCIAL]  163.37,138.91 0 bottom
FID102  FIDUCIALUFIDUCIAL  [MICRO-FIDUCIAL]  150.65,119.66 0 bottom
FID103  FIDUCIALUFIDUCIAL  [MICRO-FIDUCIAL]  184.2,138.91 0 bottom
FID104  FIDUCIALUFIDUCIAL  [MICRO-FIDUCIAL]  171.48,119.66 0 bottom
FID105  FIDUCIALUFIDUCIAL  [MICRO-FIDUCIAL]  121.72,162.28 0 bottom
FID106  FIDUCIALUFIDUCIAL  [MICRO-FIDUCIAL]  108.99,143.03 0 bottom
FID107  FIDUCIALUFIDUCIAL  [MICRO-FIDUCIAL]  142.54,162.28 0 bottom
FID108  FIDUCIALUFIDUCIAL  [MICRO-FIDUCIAL]  129.82,143.03 0 bottom
FID109  FIDUCIALUFIDUCIAL  [MICRO-FIDUCIAL]  163.37,162.28 0 bottom
FID110  FIDUCIALUFIDUCIAL  [MICRO-FIDUCIAL]  150.65,143.03 0 bottom
FID111  FIDUCIALUFIDUCIAL  [MICRO-FIDUCIAL]  184.2,162.28 0 bottom
FID112  FIDUCIALUFIDUCIAL  [MICRO-FIDUCIAL]  171.48,143.03 0 bottom
FID113  FIDUCIALUFIDUCIAL  [MICRO-FIDUCIAL]  121.72,185.65 0 bottom
FID114  FIDUCIALUFIDUCIAL  [MICRO-FIDUCIAL]  108.99,166.4 0 bottom
FID115  FIDUCIALUFIDUCIAL  [MICRO-FIDUCIAL]  142.54,185.65 0 bottom
FID116  FIDUCIALUFIDUCIAL  [MICRO-FIDUCIAL]  129.82,166.4 0 bottom
FID117  FIDUCIALUFIDUCIAL  [MICRO-FIDUCIAL]  163.37,185.65 0 bottom
FID118  FIDUCIALUFIDUCIAL  [MICRO-FIDUCIAL]  150.65,166.4 0 bottom
FID119  FIDUCIALUFIDUCIAL  [MICRO-FIDUCIAL]  184.2,185.65 0 bottom
FID120  FIDUCIALUFIDUCIAL  [MICRO-FIDUCIAL]  171.48,166.4 0 bottom
FID121  FIDUCIALUFIDUCIAL  [MICRO-FIDUCIAL]  121.72,209.02 0 bottom
FID122  FIDUCIALUFIDUCIAL  [MICRO-FIDUCIAL]  108.99,189.76 0 bottom
FID123  FIDUCIALUFIDUCIAL  [MICRO-FIDUCIAL]  142.54,209.02 0 bottom
FID124  FIDUCIALUFIDUCIAL  [MICRO-FIDUCIAL]  129.82,189.76 0 bottom
FID125  FIDUCIALUFIDUCIAL  [MICRO-FIDUCIAL]  163.37,209.02 0 bottom
FID126  FIDUCIALUFIDUCIAL  [MICRO-FIDUCIAL]  150.65,189.76 0 bottom
FID127  FIDUCIALUFIDUCIAL  [MICRO-FIDUCIAL]  184.2,209.02 0 bottom
FID128  FIDUCIALUFIDUCIAL  [MICRO-FIDUCIAL]  171.48,189.76 0 bottom
J1  OLED_SCREEN  [OLED-SCREEN]  17.02,19.56 0 top
J2  MICROVIEW-16  [MV-DIP16]  17.02,19.56 0 top
J3  MICROVIEW-16  [MV-DIP16]  37.85,19.56 0 top
J4  OLED_SCREEN  [OLED-SCREEN]  37.85,19.56 0 top
J5  MICROVIEW-16  [MV-DIP16]  58.67,19.56 0 top
J6  OLED_SCREEN  [OLED-SCREEN]  58.67,19.56 0 top
J7  MICROVIEW-16  [MV-DIP16]  79.5,19.56 0 top
J8  OLED_SCREEN  [OLED-SCREEN]  79.5,19.56 0 top
J9  MICROVIEW-16  [MV-DIP16]  17.02,42.93 0 top
J10  OLED_SCREEN  [OLED-SCREEN]  17.02,42.93 0 top
J11  MICROVIEW-16  [MV-DIP16]  37.85,42.93 0 top
J12  OLED_SCREEN  [OLED-SCREEN]  37.85,42.93 0 top
J13  MICROVIEW-16  [MV-DIP16]  58.67,42.93 0 top
J14  OLED_SCREEN  [OLED-SCREEN]  58.67,42.93 0 top
J15  MICROVIEW-16  [MV-DIP16]  79.5,42.93 0 top
J16  OLED_SCREEN  [OLED-SCREEN]  79.5,42.93 0 top
J17  MICROVIEW-16  [MV-DIP16]  17.02,66.29 0 top
J18  OLED_SCREEN  [OLED-SCREEN]  17.02,66.29 0 top
J19  MICROVIEW-16  [MV-DIP16]  37.85,66.29 0 top
J20  OLED_SCREEN  [OLED-SCREEN]  37.85,66.29 0 top
J21  MICROVIEW-16  [MV-DIP16]  58.67,66.29 0 top
J22  OLED_SCREEN  [OLED-SCREEN]  58.67,66.29 0 top
J23  MICROVIEW-16  [MV-DIP16]  79.5,66.29 0 top
J24  OLED_SCREEN  [OLED-SCREEN]  79.5,66.29 0 top
J25  MICROVIEW-16  [MV-DIP16]  17.02,89.66 0 top
J26  OLED_SCREEN  [OLED-SCREEN]  17.02,89.66 0 top
J27  MICROVIEW-16  [MV-DIP16]  37.85,89.66 0 top
J28  OLED_SCREEN  [OLED-SCREEN]  37.85,89.66 0 top
J29  MICROVIEW-16  [MV-DIP16]  58.67,89.66 0 top
J30  OLED_SCREEN  [OLED-SCREEN]  58.67,89.66 0 top
J31  MICROVIEW-16  [MV-DIP16]  79.5,89.66 0 top
J32  OLED_SCREEN  [OLED-SCREEN]  79.5,89.66 0 top
J33  MICROVIEW-16  [MV-DIP16]  114.05,19.56 0 top
J34  OLED_SCREEN  [OLED-SCREEN]  114.05,19.56 0 top
J35  MICROVIEW-16  [MV-DIP16]  134.87,19.56 0 top
J36  OLED_SCREEN  [OLED-SCREEN]  134.87,19.56 0 top
J37  MICROVIEW-16  [MV-DIP16]  155.7,19.56 0 top
J38  OLED_SCREEN  [OLED-SCREEN]  155.7,19.56 0 top
J39  MICROVIEW-16  [MV-DIP16]  176.53,19.56 0 top
J40  OLED_SCREEN  [OLED-SCREEN]  176.53,19.56 0 top
J41  MICROVIEW-16  [MV-DIP16]  114.05,42.93 0 top
J42  OLED_SCREEN  [OLED-SCREEN]  114.05,42.93 0 top
J43  MICROVIEW-16  [MV-DIP16]  134.87,42.93 0 top
J44  OLED_SCREEN  [OLED-SCREEN]  134.87,42.93 0 top
J45  MICROVIEW-16  [MV-DIP16]  155.7,42.93 0 top
J46  OLED_SCREEN  [OLED-SCREEN]  155.7,42.93 0 top
J47  MICROVIEW-16  [MV-DIP16]  176.53,42.93 0 top
J48  OLED_SCREEN  [OLED-SCREEN]  176.53,42.93 0 top
J49  MICROVIEW-16  [MV-DIP16]  114.05,66.29 0 top
J50  OLED_SCREEN  [OLED-SCREEN]  114.05,66.29 0 top
J51  MICROVIEW-16  [MV-DIP16]  134.87,66.29 0 top
J52  OLED_SCREEN  [OLED-SCREEN]  134.87,66.29 0 top
J53  MICROVIEW-16  [MV-DIP16]  155.7,66.29 0 top
J54  OLED_SCREEN  [OLED-SCREEN]  155.7,66.29 0 top
J55  MICROVIEW-16  [MV-DIP16]  176.53,66.29 0 top
J56  OLED_SCREEN  [OLED-SCREEN]  176.53,66.29 0 top
J57  MICROVIEW-16  [MV-DIP16]  114.05,89.66 0 top
J58  OLED_SCREEN  [OLED-SCREEN]  114.05,89.66 0 top
J59  MICROVIEW-16  [MV-DIP16]  134.87,89.66 0 top
J60  OLED_SCREEN  [OLED-SCREEN]  134.87,89.66 0 top
J61  MICROVIEW-16  [MV-DIP16]  155.7,89.66 0 top
J62  OLED_SCREEN  [OLED-SCREEN]  155.7,89.66 0 top
J63  MICROVIEW-16  [MV-DIP16]  176.53,89.66 0 top
J64  OLED_SCREEN  [OLED-SCREEN]  176.53,89.66 0 top
J65  MICROVIEW-16  [MV-DIP16]  17.02,129.29 0 top
J66  OLED_SCREEN  [OLED-SCREEN]  17.02,129.29 0 top
J67  MICROVIEW-16  [MV-DIP16]  37.85,129.29 0 top
J68  OLED_SCREEN  [OLED-SCREEN]  37.85,129.29 0 top
J69  MICROVIEW-16  [MV-DIP16]  58.67,129.29 0 top
J70  OLED_SCREEN  [OLED-SCREEN]  58.67,129.29 0 top
J71  MICROVIEW-16  [MV-DIP16]  79.5,129.29 0 top
J72  OLED_SCREEN  [OLED-SCREEN]  79.5,129.29 0 top
J73  MICROVIEW-16  [MV-DIP16]  17.02,152.65 0 top
J74  OLED_SCREEN  [OLED-SCREEN]  17.02,152.65 0 top
J75  MICROVIEW-16  [MV-DIP16]  37.85,152.65 0 top
J76  OLED_SCREEN  [OLED-SCREEN]  37.85,152.65 0 top
J77  MICROVIEW-16  [MV-DIP16]  58.67,152.65 0 top
J78  OLED_SCREEN  [OLED-SCREEN]  58.67,152.65 0 top
J79  MICROVIEW-16  [MV-DIP16]  79.5,152.65 0 top
J80  OLED_SCREEN  [OLED-SCREEN]  79.5,152.65 0 top
J81  MICROVIEW-16  [MV-DIP16]  17.02,176.02 0 top
J82  OLED_SCREEN  [OLED-SCREEN]  17.02,176.02 0 top
J83  MICROVIEW-16  [MV-DIP16]  37.85,176.02 0 top
J84  OLED_SCREEN  [OLED-SCREEN]  37.85,176.02 0 top
J85  MICROVIEW-16  [MV-DIP16]  58.67,176.02 0 top
J86  OLED_SCREEN  [OLED-SCREEN]  58.67,176.02 0 top
J87  MICROVIEW-16  [MV-DIP16]  79.5,176.02 0 top
J88  OLED_SCREEN  [OLED-SCREEN]  79.5,176.02 0 top
J89  MICROVIEW-16  [MV-DIP16]  17.02,199.39 0 top
J90  OLED_SCREEN  [OLED-SCREEN]  17.02,199.39 0 top
J91  MICROVIEW-16  [MV-DIP16]  37.85,199.39 0 top
J92  OLED_SCREEN  [OLED-SCREEN]  37.85,199.39 0 top
J93  MICROVIEW-16  [MV-DIP16]  58.67,199.39 0 top
J94  OLED_SCREEN  [OLED-SCREEN]  58.67,199.39 0 top
J95  MICROVIEW-16  [MV-DIP16]  79.5,199.39 0 top
J96  OLED_SCREEN  [OLED-SCREEN]  79.5,199.39 0 top
J97  MICROVIEW-16  [MV-DIP16]  114.05,129.29 0 top
J98  OLED_SCREEN  [OLED-SCREEN]  114.05,129.29 0 top
J99  MICROVIEW-16  [MV-DIP16]  134.87,129.29 0 top
J100  OLED_SCREEN  [OLED-SCREEN]  134.87,129.29 0 top
J101  MICROVIEW-16  [MV-DIP16]  155.7,129.29 0 top
J102  OLED_SCREEN  [OLED-SCREEN]  155.7,129.29 0 top
J103  MICROVIEW-16  [MV-DIP16]  176.53,129.29 0 top
J104  OLED_SCREEN  [OLED-SCREEN]  176.53,129.29 0 top
J105  MICROVIEW-16  [MV-DIP16]  114.05,152.65 0 top
J106  OLED_SCREEN  [OLED-SCREEN]  114.05,152.65 0 top
J107  MICROVIEW-16  [MV-DIP16]  134.87,152.65 0 top
J108  OLED_SCREEN  [OLED-SCREEN]  134.87,152.65 0 top
J109  MICROVIEW-16  [MV-DIP16]  155.7,152.65 0 top
J110  OLED_SCREEN  [OLED-SCREEN]  155.7,152.65 0 top
J111  MICROVIEW-16  [MV-DIP16]  176.53,152.65 0 top
J112  OLED_SCREEN  [OLED-SCREEN]  176.53,152.65 0 top
J113  MICROVIEW-16  [MV-DIP16]  114.05,176.02 0 top
J114  OLED_SCREEN  [OLED-SCREEN]  114.05,176.02 0 top
J115  MICROVIEW-16  [MV-DIP16]  134.87,176.02 0 top
J116  OLED_SCREEN  [OLED-SCREEN]  134.87,176.02 0 top
J117  MICROVIEW-16  [MV-DIP16]  155.7,176.02 0 top
J118  OLED_SCREEN  [OLED-SCREEN]  155.7,176.02 0 top
J119  MICROVIEW-16  [MV-DIP16]  176.53,176.02 0 top
J120  OLED_SCREEN  [OLED-SCREEN]  176.53,176.02 0 top
J121  MICROVIEW-16  [MV-DIP16]  114.05,199.39 0 top
J122  OLED_SCREEN  [OLED-SCREEN]  114.05,199.39 0 top
J123  MICROVIEW-16  [MV-DIP16]  134.87,199.39 0 top
J124  OLED_SCREEN  [OLED-SCREEN]  134.87,199.39 0 top
J125  MICROVIEW-16  [MV-DIP16]  155.7,199.39 0 top
J126  OLED_SCREEN  [OLED-SCREEN]  155.7,199.39 0 top
J127  MICROVIEW-16  [MV-DIP16]  176.53,199.39 0 top
J128  OLED_SCREEN  [OLED-SCREEN]  176.53,199.39 0 top
LOGO1  OSHW-LOGOS  [OSHW-LOGO-S]  12.83,23.75 0 top
LOGO2  OSHW-LOGOS  [OSHW-LOGO-S]  33.66,23.75 0 top
LOGO3  SFE_LOGO_NAME_FLAME.1_INCH  [SFE_LOGO_NAME_FLAME_.1]  29.72,19.56 0 top
LOGO4  SFE_LOGO_NAME_FLAME.1_INCH  [SFE_LOGO_NAME_FLAME_.1]  8.89,19.56 0 top
LOGO5  OSHW-LOGOS  [OSHW-LOGO-S]  54.48,23.75 0 top
LOGO6  SFE_LOGO_NAME_FLAME.1_INCH  [SFE_LOGO_NAME_FLAME_.1]  50.55,19.56 0 top
LOGO7  OSHW-LOGOS  [OSHW-LOGO-S]  75.31,23.75 0 top
LOGO8  SFE_LOGO_NAME_FLAME.1_INCH  [SFE_LOGO_NAME_FLAME_.1]  71.37,19.56 0 top
LOGO9  OSHW-LOGOS  [OSHW-LOGO-S]  12.83,47.12 0 top
LOGO10  SFE_LOGO_NAME_FLAME.1_INCH  [SFE_LOGO_NAME_FLAME_.1]  8.89,42.93 0 top
LOGO11  OSHW-LOGOS  [OSHW-LOGO-S]  33.66,47.12 0 top
LOGO12  SFE_LOGO_NAME_FLAME.1_INCH  [SFE_LOGO_NAME_FLAME_.1]  29.72,42.93 0 top
LOGO13  OSHW-LOGOS  [OSHW-LOGO-S]  54.48,47.12 0 top
LOGO14  SFE_LOGO_NAME_FLAME.1_INCH  [SFE_LOGO_NAME_FLAME_.1]  50.55,42.93 0 top
LOGO15  OSHW-LOGOS  [OSHW-LOGO-S]  75.31,47.12 0 top
LOGO16  SFE_LOGO_NAME_FLAME.1_INCH  [SFE_LOGO_NAME_FLAME_.1]  71.37,42.93 0 top
LOGO17  OSHW-LOGOS  [OSHW-LOGO-S]  12.83,70.48 0 top